# EAGLE board touch_pot_Panel_v12 (EAGLE 6.6.0), part 1 of 2
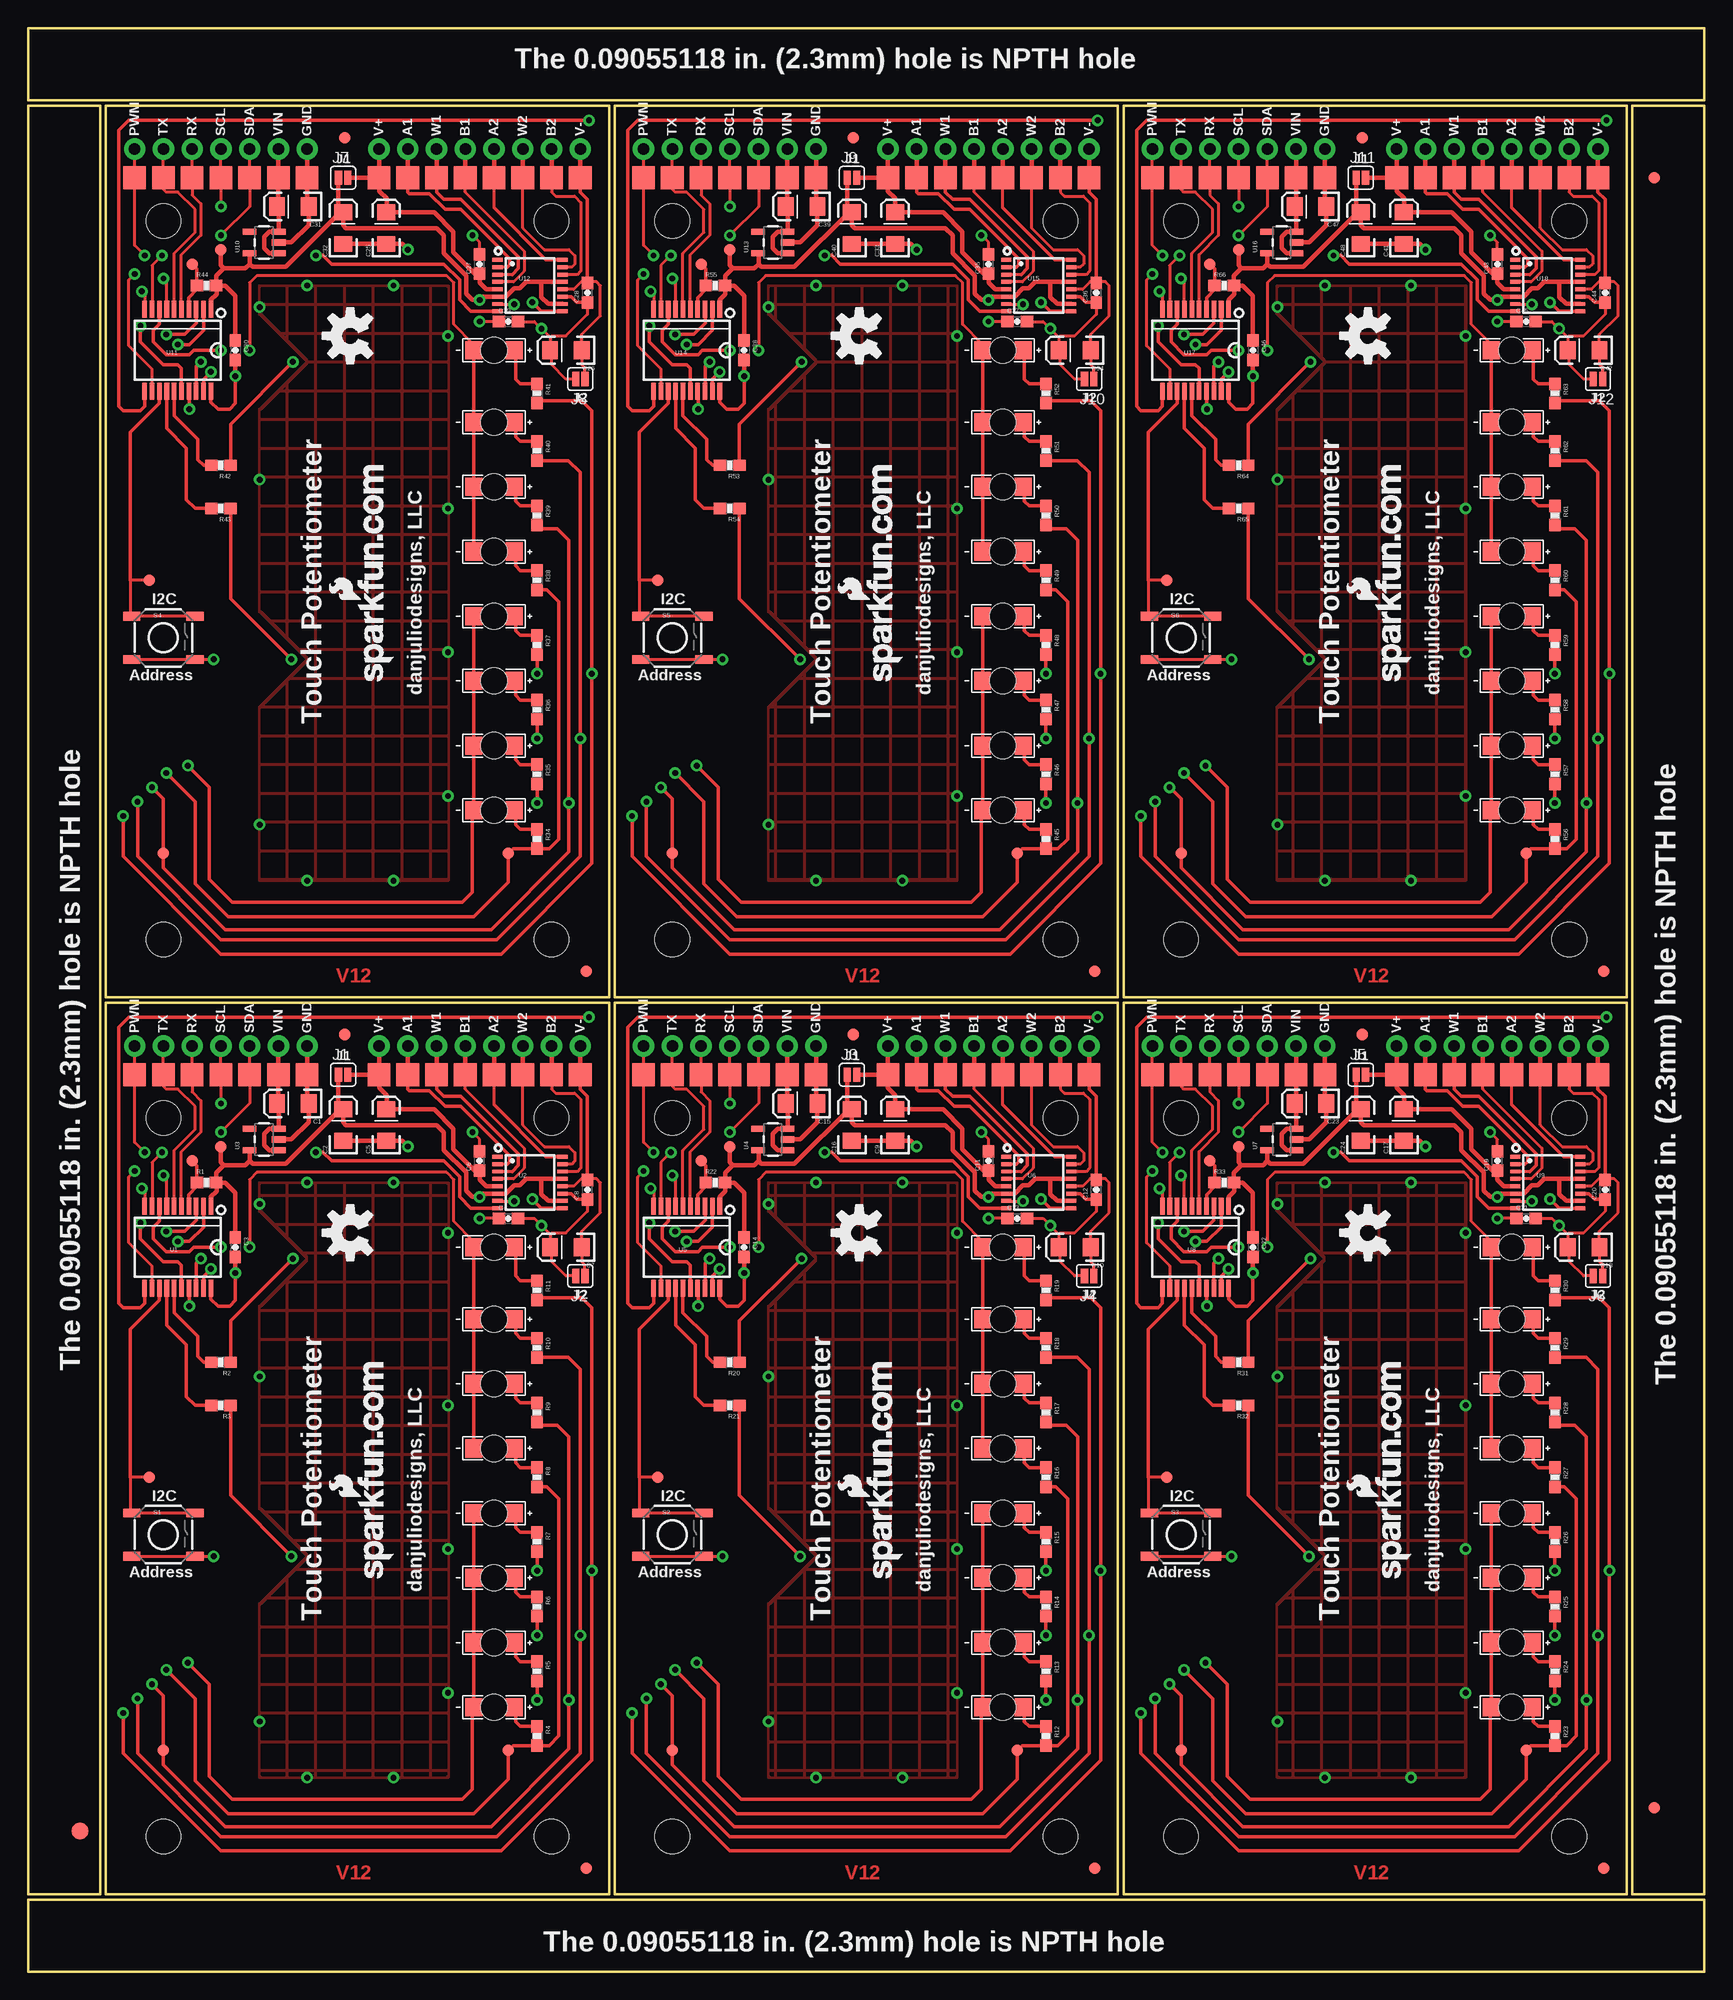
[diagram p0: board, top side]
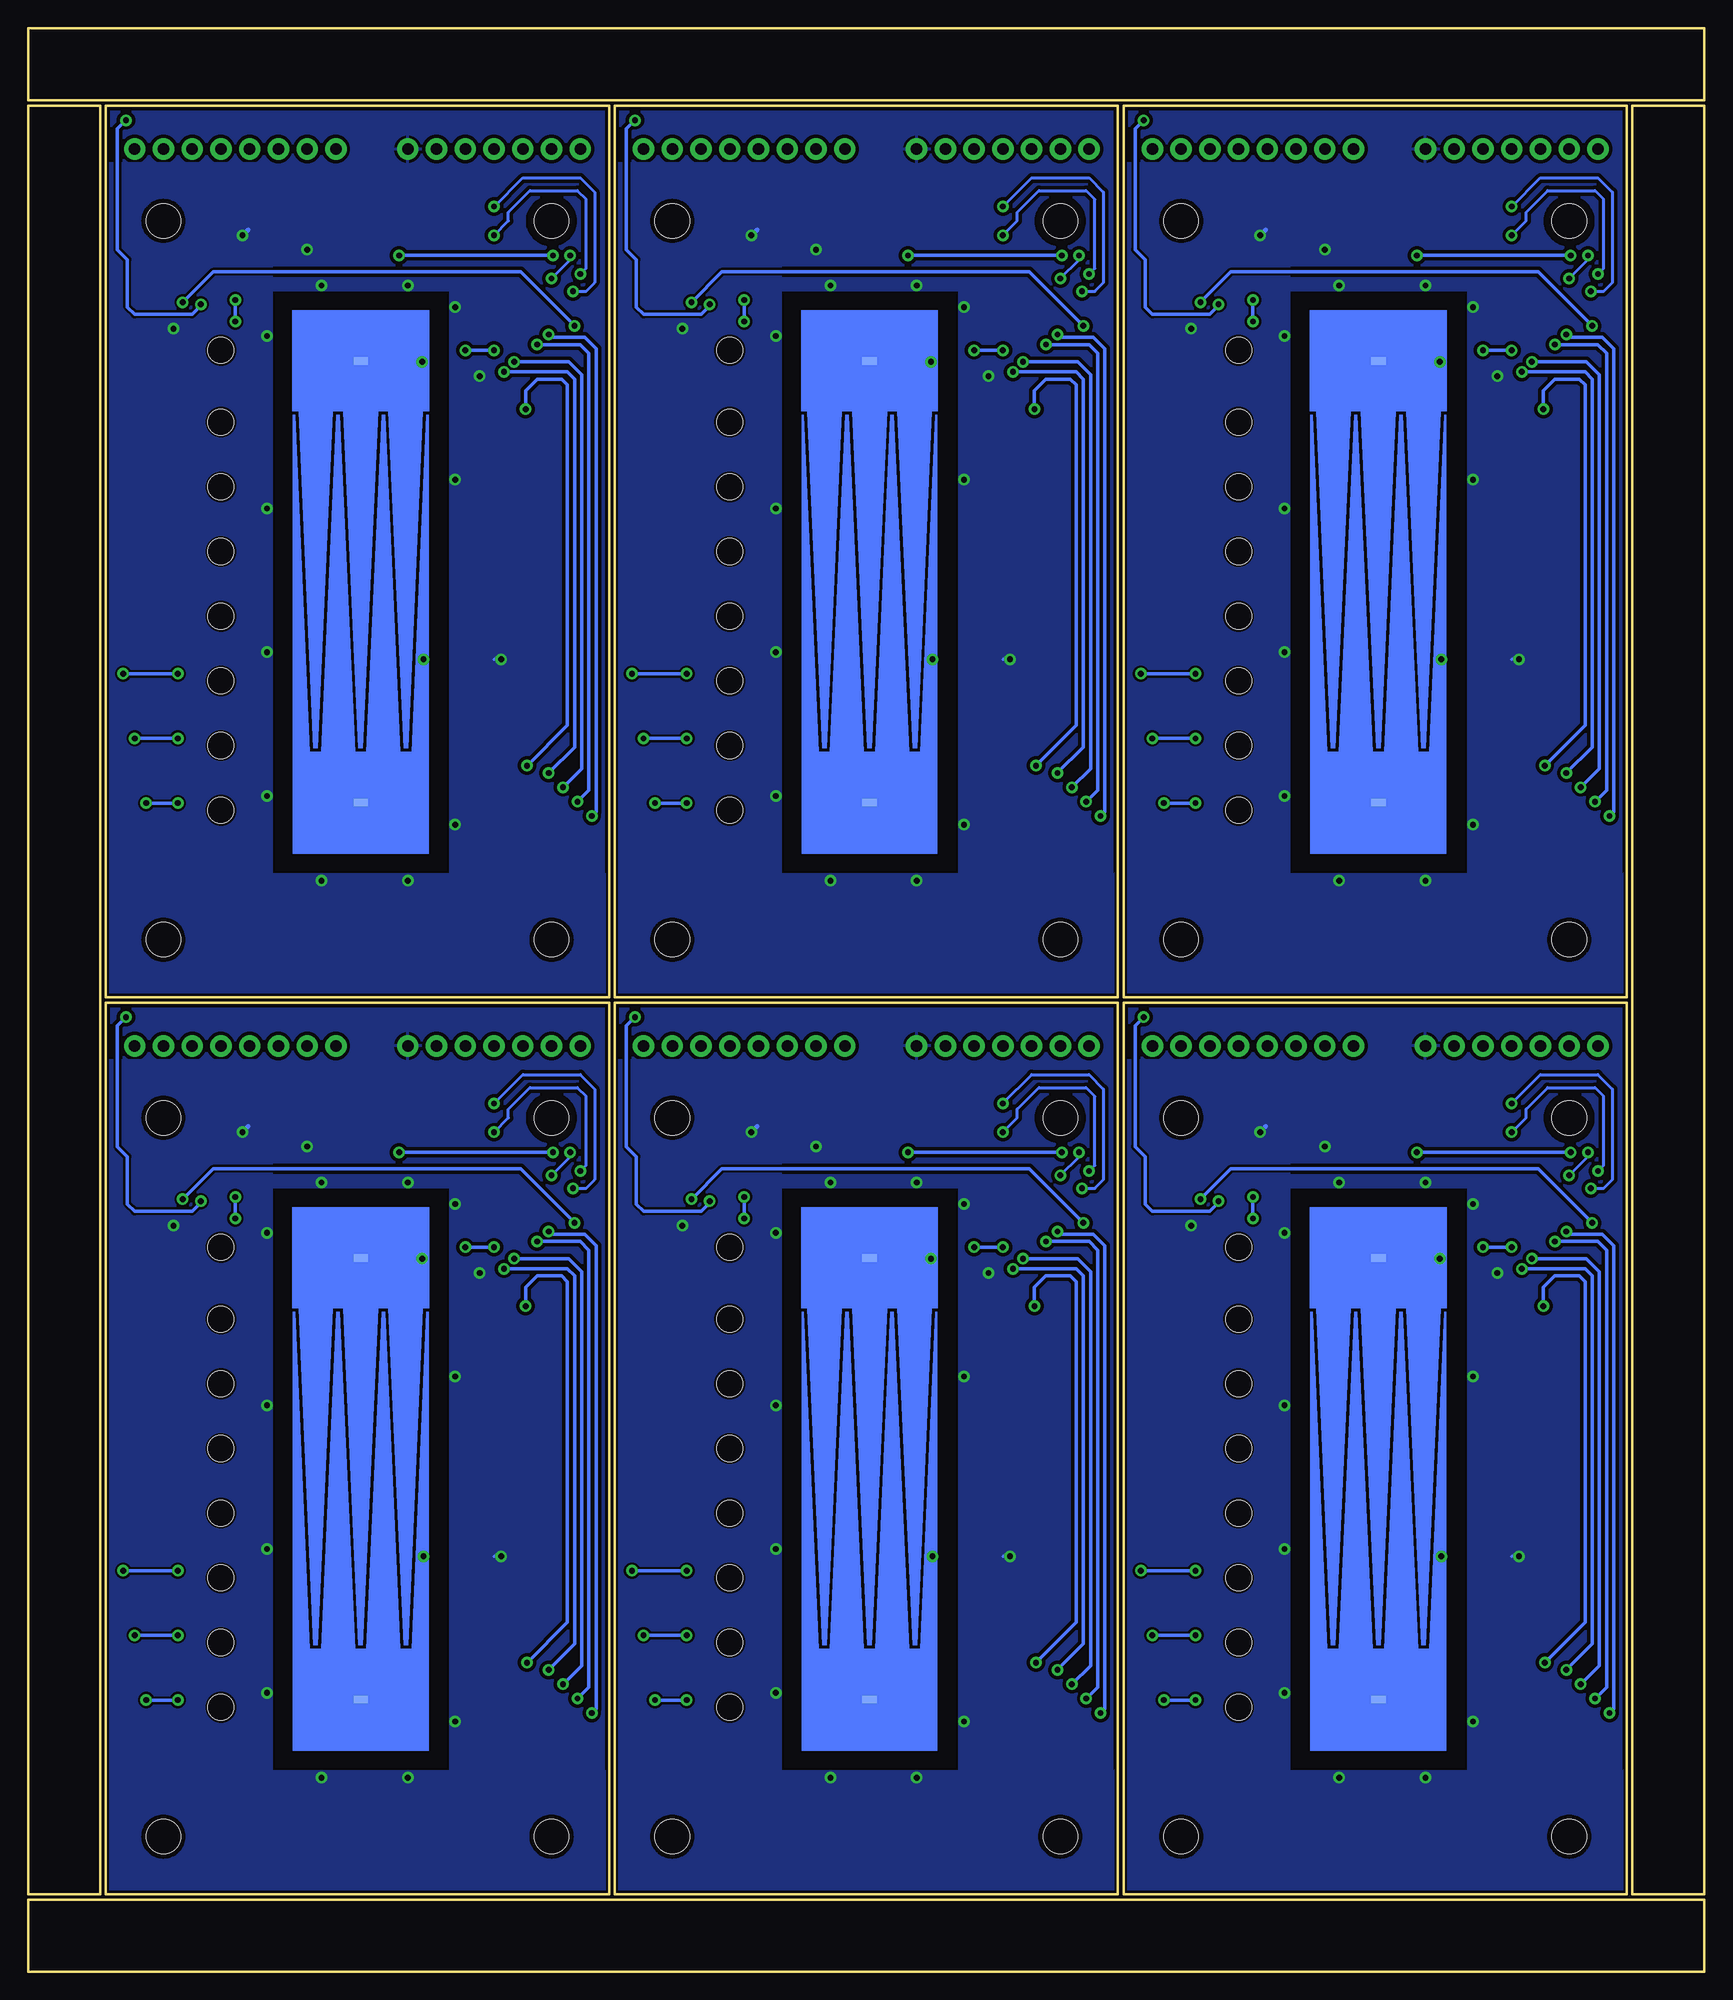
[diagram p1: board, bottom side, seen from below]

Size 148.08 x 171.7 mm. Coordinates in mm from the lower left corner, seen from the top.
Outline: 6.86,6.86 51.31,6.86 51.31,85.6 6.86,85.6 6.86,6.86
Outline: 51.82,6.86 96.27,6.86 96.27,85.6 51.82,85.6 51.82,6.86
Outline: 96.77,6.86 141.22,6.86 141.22,85.6 96.77,85.6 96.77,6.86
Outline: 6.86,86.11 51.31,86.11 51.31,164.85 6.86,164.85 6.86,86.11
Outline: 51.82,86.11 96.27,86.11 96.27,164.85 51.82,164.85 51.82,86.11
Outline: 96.77,86.11 141.22,86.11 141.22,164.85 96.77,164.85 96.77,86.11
Outline: 6.35,6.86 6.35,164.85 0,164.85 0,6.86 6.35,6.86
Outline: 0,0 148.08,0 148.08,6.35 0,6.35 0,0
Outline: 141.73,6.86 148.08,6.86 148.08,164.85 141.73,164.85 141.73,6.86
Outline: 148.08,171.7 0,171.7 0,165.35 148.08,165.35 148.08,171.7
Copper layers (1*16): Top 0.035mm / dielectric 1.5mm / Bottom 0.035mm
Design rules "SparkFun-2-layer": minimum track width 7mil, minimum drill 15mil, track to track 8mil, track to pad 8mil, pad to pad 8mil, via to via 8mil, smd to smd 8mil, copper to edge 8mil, drill to drill 8mil, minimum pad ring 12mil, minimum via ring 10mil, stop-mask expansion 4mil, vias tented up to drill 20mil, thermal gap 10mil

## Footprints (pad centres in the part's own frame; a part is rotated, then mirrored left to right if it is on the bottom)
EIA3216 = smd 1.4 x 1.6: A 1.4,0; C -1.4,0
0603-CAP = smd 1.1 x 1: 1 -0.85,0; 2 0.85,0
2MM_SMD_PAD = smd 2 x 2: P$1 0,0
LED-1206-BOTTOM = smd 1.5 x 1.6: A -1.8,0; C 1.8,0 | hole 2.3: 0,0
FIDUCIAL-1.5X3 = smd 1.5 x 1.5: 1 0,0
FIDUCIAL-1X2 = smd 1 x 1: 1 0,0
SJ_2S = smd 0.635 x 1.27: 1 -0.412,0; 2 0.412,0
1X01NS = drill 1.016 pad 1.88: 1 0,0
0603-RES = smd 1.1 x 1: 1 -0.85,0; 2 0.85,0
TACTILE-SWITCH-SMD = smd 1.524 x 0.762: 1 -2.794,1.905; 2 2.794,1.905; 3 -2.794,-1.905; 4 2.794,-1.905
STAND-OFF-TIGHT = hole 3.048: 0,0
PAD.03X.04 = smd 1.016 x 1.016: P$1 0,0
2CH_48MM_LINEAR_TOUCH = smd 1.27 x 0.635: P$1 6,4.5; P$2 6,43.5
SSOP20 = smd 0.4 x 1.5: 1 -2.925,-3.625; 2 -2.275,-3.625; 3 -1.625,-3.625; 4 -0.975,-3.625; 5 -0.325,-3.625; 6 0.325,-3.625; 7 0.975,-3.625; 8 1.625,-3.625; 9 2.275,-3.625; 10 2.925,-3.625; 11 2.925,3.625; 12 2.275,3.625; 13 1.625,3.625; 14 0.975,3.625; 15 0.325,3.625; 16 -0.325,3.625; 17 -0.975,3.625; 18 -1.625,3.625; 19 -2.275,3.625; 20 -2.925,3.625
SSOP16 = smd 0.9 x 0.35: 1 -2.875,2.275; 2 -2.875,1.625; 3 -2.875,0.975; 4 -2.875,0.325; 5 -2.875,-0.325; 6 -2.875,-0.975; 7 -2.875,-1.625; 8 -2.875,-2.275; 9 2.875,-2.275; 10 2.875,-1.625; 11 2.875,-0.975; 12 2.875,-0.325; 13 2.875,0.325; 14 2.875,0.975; 15 2.875,1.625; 16 2.875,2.275
SOT23-5 = smd 0.55 x 1.2: 1 -0.95,-1.3; 2 0,-1.3; 3 0.95,-1.3; 4 0.95,1.3; 5 -0.95,1.3

## Placement (x,y rotation side)
C1  10uF  [EIA3216]  23.37,76.71 180 top
C2  10uF  [EIA3216]  27.81,74.8 90 top
C3  0.1uF  [0603-CAP]  18.29,64.01 270 top
C4  0.1uF  [0603-CAP]  42.42,66.55 0 top
C5  10uF  [EIA3216]  31.62,74.8 90 top
C6  0.1uF  [0603-CAP]  39.88,71.63 90 top
C7  10uF  [EIA3216]  47.5,64.01 180 top
C8  0.1uF  [0603-CAP]  49.4,69.09 90 top
C9  10uF  [EIA3216]  76.58,74.8 90 top
C10  10uF  [EIA3216]  92.46,64.01 180 top
C11  0.1uF  [0603-CAP]  84.84,71.63 90 top
C12  0.1uF  [0603-CAP]  94.36,69.09 90 top
C13  0.1uF  [0603-CAP]  87.38,66.55 0 top
C14  0.1uF  [0603-CAP]  63.25,64.01 270 top
C15  10uF  [EIA3216]  68.33,76.71 180 top
C16  10uF  [EIA3216]  72.77,74.8 90 top
C17  10uF  [EIA3216]  121.54,74.8 90 top
C18  10uF  [EIA3216]  137.41,64.01 180 top
C19  0.1uF  [0603-CAP]  129.79,71.63 90 top
C20  0.1uF  [0603-CAP]  139.32,69.09 90 top
C21  0.1uF  [0603-CAP]  132.33,66.55 0 top
C22  0.1uF  [0603-CAP]  108.2,64.01 270 top
C23  10uF  [EIA3216]  113.28,76.71 180 top
C24  10uF  [EIA3216]  117.73,74.8 90 top
C25  10uF  [EIA3216]  31.62,154.05 90 top
C26  10uF  [EIA3216]  47.5,143.26 180 top
C27  0.1uF  [0603-CAP]  39.88,150.88 90 top
C28  0.1uF  [0603-CAP]  49.4,148.34 90 top
C29  0.1uF  [0603-CAP]  42.42,145.8 0 top
C30  0.1uF  [0603-CAP]  18.29,143.26 270 top
C31  10uF  [EIA3216]  23.37,155.96 180 top
C32  10uF  [EIA3216]  27.81,154.05 90 top
C33  10uF  [EIA3216]  76.58,154.05 90 top
C34  10uF  [EIA3216]  92.46,143.26 180 top
C35  0.1uF  [0603-CAP]  84.84,150.88 90 top
C36  0.1uF  [0603-CAP]  94.36,148.34 90 top
C37  0.1uF  [0603-CAP]  87.38,145.8 0 top
C38  0.1uF  [0603-CAP]  63.25,143.26 270 top
C39  10uF  [EIA3216]  68.33,155.96 180 top
C40  10uF  [EIA3216]  72.77,154.05 90 top
C41  10uF  [EIA3216]  121.54,154.05 90 top
C42  10uF  [EIA3216]  137.41,143.26 180 top
C43  0.1uF  [0603-CAP]  129.79,150.88 90 top
C44  0.1uF  [0603-CAP]  139.32,148.34 90 top
C45  0.1uF  [0603-CAP]  132.33,145.8 0 top
C46  0.1uF  [0603-CAP]  108.2,143.26 270 top
C47  10uF  [EIA3216]  113.28,155.96 180 top
C48  10uF  [EIA3216]  117.73,154.05 90 top
CON1  [2MM_SMD_PAD]  19.56,79.25 0 top
CON2  [2MM_SMD_PAD]  17.02,79.25 0 top
CON3  [2MM_SMD_PAD]  9.4,79.25 0 top
CON4  [2MM_SMD_PAD]  14.48,79.25 0 top
CON5  [2MM_SMD_PAD]  11.94,79.25 0 top
CON6  [2MM_SMD_PAD]  22.1,79.25 0 top
CON7  [2MM_SMD_PAD]  24.64,79.25 0 top
CON8  [2MM_SMD_PAD]  48.77,79.25 0 top
CON9  [2MM_SMD_PAD]  46.23,79.25 0 top
CON10  [2MM_SMD_PAD]  43.69,79.25 0 top
CON11  [2MM_SMD_PAD]  41.15,79.25 0 top
CON12  [2MM_SMD_PAD]  38.61,79.25 0 top
CON13  [2MM_SMD_PAD]  36.07,79.25 0 top
CON14  [2MM_SMD_PAD]  33.53,79.25 0 top
CON15  [2MM_SMD_PAD]  30.99,79.25 0 top
CON16  [2MM_SMD_PAD]  64.52,79.25 0 top
CON17  [2MM_SMD_PAD]  61.98,79.25 0 top
CON18  [2MM_SMD_PAD]  54.36,79.25 0 top
CON19  [2MM_SMD_PAD]  59.44,79.25 0 top
CON20  [2MM_SMD_PAD]  56.9,79.25 0 top
CON21  [2MM_SMD_PAD]  67.06,79.25 0 top
CON22  [2MM_SMD_PAD]  69.6,79.25 0 top
CON23  [2MM_SMD_PAD]  93.73,79.25 0 top
CON24  [2MM_SMD_PAD]  91.19,79.25 0 top
CON25  [2MM_SMD_PAD]  88.65,79.25 0 top
CON26  [2MM_SMD_PAD]  86.11,79.25 0 top
CON27  [2MM_SMD_PAD]  83.57,79.25 0 top
CON28  [2MM_SMD_PAD]  81.03,79.25 0 top
CON29  [2MM_SMD_PAD]  78.49,79.25 0 top
CON30  [2MM_SMD_PAD]  75.95,79.25 0 top
CON31  [2MM_SMD_PAD]  109.47,79.25 0 top
CON32  [2MM_SMD_PAD]  106.93,79.25 0 top
CON33  [2MM_SMD_PAD]  99.31,79.25 0 top
CON34  [2MM_SMD_PAD]  104.39,79.25 0 top
CON35  [2MM_SMD_PAD]  101.85,79.25 0 top
CON36  [2MM_SMD_PAD]  112.01,79.25 0 top
CON37  [2MM_SMD_PAD]  114.55,79.25 0 top
CON38  [2MM_SMD_PAD]  138.68,79.25 0 top
CON39  [2MM_SMD_PAD]  136.14,79.25 0 top
CON40  [2MM_SMD_PAD]  133.6,79.25 0 top
CON41  [2MM_SMD_PAD]  131.06,79.25 0 top
CON42  [2MM_SMD_PAD]  128.52,79.25 0 top
CON43  [2MM_SMD_PAD]  125.98,79.25 0 top
CON44  [2MM_SMD_PAD]  123.44,79.25 0 top
CON45  [2MM_SMD_PAD]  120.9,79.25 0 top
CON46  [2MM_SMD_PAD]  19.56,158.5 0 top
CON47  [2MM_SMD_PAD]  17.02,158.5 0 top
CON48  [2MM_SMD_PAD]  9.4,158.5 0 top
CON49  [2MM_SMD_PAD]  14.48,158.5 0 top
CON50  [2MM_SMD_PAD]  11.94,158.5 0 top
CON51  [2MM_SMD_PAD]  22.1,158.5 0 top
CON52  [2MM_SMD_PAD]  24.64,158.5 0 top
CON53  [2MM_SMD_PAD]  48.77,158.5 0 top
CON54  [2MM_SMD_PAD]  46.23,158.5 0 top
CON55  [2MM_SMD_PAD]  43.69,158.5 0 top
CON56  [2MM_SMD_PAD]  41.15,158.5 0 top
CON57  [2MM_SMD_PAD]  38.61,158.5 0 top
CON58  [2MM_SMD_PAD]  36.07,158.5 0 top
CON59  [2MM_SMD_PAD]  33.53,158.5 0 top
CON60  [2MM_SMD_PAD]  30.99,158.5 0 top
CON61  [2MM_SMD_PAD]  64.52,158.5 0 top
CON62  [2MM_SMD_PAD]  61.98,158.5 0 top
CON63  [2MM_SMD_PAD]  54.36,158.5 0 top
CON64  [2MM_SMD_PAD]  59.44,158.5 0 top
CON65  [2MM_SMD_PAD]  56.9,158.5 0 top
CON66  [2MM_SMD_PAD]  67.06,158.5 0 top
CON67  [2MM_SMD_PAD]  69.6,158.5 0 top
CON68  [2MM_SMD_PAD]  93.73,158.5 0 top
CON69  [2MM_SMD_PAD]  91.19,158.5 0 top
CON70  [2MM_SMD_PAD]  88.65,158.5 0 top
CON71  [2MM_SMD_PAD]  86.11,158.5 0 top
CON72  [2MM_SMD_PAD]  83.57,158.5 0 top
CON73  [2MM_SMD_PAD]  81.03,158.5 0 top
CON74  [2MM_SMD_PAD]  78.49,158.5 0 top
CON75  [2MM_SMD_PAD]  75.95,158.5 0 top
CON76  [2MM_SMD_PAD]  109.47,158.5 0 top
CON77  [2MM_SMD_PAD]  106.93,158.5 0 top
CON78  [2MM_SMD_PAD]  99.31,158.5 0 top
CON79  [2MM_SMD_PAD]  104.39,158.5 0 top
CON80  [2MM_SMD_PAD]  101.85,158.5 0 top
CON81  [2MM_SMD_PAD]  112.01,158.5 0 top
CON82  [2MM_SMD_PAD]  114.55,158.5 0 top
CON83  [2MM_SMD_PAD]  138.68,158.5 0 top
CON84  [2MM_SMD_PAD]  136.14,158.5 0 top
CON85  [2MM_SMD_PAD]  133.6,158.5 0 top
CON86  [2MM_SMD_PAD]  131.06,158.5 0 top
CON87  [2MM_SMD_PAD]  128.52,158.5 0 top
CON88  [2MM_SMD_PAD]  125.98,158.5 0 top
CON89  [2MM_SMD_PAD]  123.44,158.5 0 top
CON90  [2MM_SMD_PAD]  120.9,158.5 0 top
D1  Green  [LED-1206-BOTTOM]  41.15,23.37 180 top
D2  Green  [LED-1206-BOTTOM]  41.15,29.08 180 top
D3  Green  [LED-1206-BOTTOM]  41.15,34.8 180 top
D4  Green  [LED-1206-BOTTOM]  41.15,40.51 180 top
D5  Green  [LED-1206-BOTTOM]  41.15,46.23 180 top
D6  Green  [LED-1206-BOTTOM]  41.15,51.94 180 top
D7  Green  [LED-1206-BOTTOM]  41.15,57.66 180 top
D8  Green  [LED-1206-BOTTOM]  41.15,64.01 180 top
D9  Green  [LED-1206-BOTTOM]  86.11,23.37 180 top
D10  Green  [LED-1206-BOTTOM]  86.11,29.08 180 top
D11  Green  [LED-1206-BOTTOM]  86.11,34.8 180 top
D12  Green  [LED-1206-BOTTOM]  86.11,40.51 180 top
D13  Green  [LED-1206-BOTTOM]  86.11,46.23 180 top
D14  Green  [LED-1206-BOTTOM]  86.11,51.94 180 top
D15  Green  [LED-1206-BOTTOM]  86.11,57.66 180 top
D16  Green  [LED-1206-BOTTOM]  86.11,64.01 180 top
D17  Green  [LED-1206-BOTTOM]  131.06,23.37 180 top
D18  Green  [LED-1206-BOTTOM]  131.06,29.08 180 top
D19  Green  [LED-1206-BOTTOM]  131.06,34.8 180 top
D20  Green  [LED-1206-BOTTOM]  131.06,40.51 180 top
D21  Green  [LED-1206-BOTTOM]  131.06,46.23 180 top
D22  Green  [LED-1206-BOTTOM]  131.06,51.94 180 top
D23  Green  [LED-1206-BOTTOM]  131.06,57.66 180 top
D24  Green  [LED-1206-BOTTOM]  131.06,64.01 180 top
D25  Green  [LED-1206-BOTTOM]  41.15,102.62 180 top
D26  Green  [LED-1206-BOTTOM]  41.15,108.33 180 top
D27  Green  [LED-1206-BOTTOM]  41.15,114.05 180 top
D28  Green  [LED-1206-BOTTOM]  41.15,119.76 180 top
D29  Green  [LED-1206-BOTTOM]  41.15,125.48 180 top
D30  Green  [LED-1206-BOTTOM]  41.15,131.19 180 top
D31  Green  [LED-1206-BOTTOM]  41.15,136.91 180 top
D32  Green  [LED-1206-BOTTOM]  41.15,143.26 180 top
D33  Green  [LED-1206-BOTTOM]  86.11,102.62 180 top
D34  Green  [LED-1206-BOTTOM]  86.11,108.33 180 top
D35  Green  [LED-1206-BOTTOM]  86.11,114.05 180 top
D36  Green  [LED-1206-BOTTOM]  86.11,119.76 180 top
D37  Green  [LED-1206-BOTTOM]  86.11,125.48 180 top
D38  Green  [LED-1206-BOTTOM]  86.11,131.19 180 top
D39  Green  [LED-1206-BOTTOM]  86.11,136.91 180 top
D40  Green  [LED-1206-BOTTOM]  86.11,143.26 180 top
D41  Green  [LED-1206-BOTTOM]  131.06,102.62 180 top
D42  Green  [LED-1206-BOTTOM]  131.06,108.33 180 top
D43  Green  [LED-1206-BOTTOM]  131.06,114.05 180 top
D44  Green  [LED-1206-BOTTOM]  131.06,119.76 180 top
D45  Green  [LED-1206-BOTTOM]  131.06,125.48 180 top
D46  Green  [LED-1206-BOTTOM]  131.06,131.19 180 top
D47  Green  [LED-1206-BOTTOM]  131.06,136.91 180 top
D48  Green  [LED-1206-BOTTOM]  131.06,143.26 180 top
E$1  [FIDUCIAL-1.5X3]  4.57,12.45 0 top
E$4  [FIDUCIAL-1X2]  143.64,14.48 0 top
E$5  [FIDUCIAL-1X2]  143.64,158.5 180 top
FID1  FIDUCIAL1X2  [FIDUCIAL-1X2]  27.94,82.8 0 top
FID2  FIDUCIAL1X2  [FIDUCIAL-1X2]  49.28,9.14 0 top
FID3  FIDUCIAL1X2  [FIDUCIAL-1X2]  72.9,82.8 0 top
FID4  FIDUCIAL1X2  [FIDUCIAL-1X2]  94.23,9.14 0 top
FID5  FIDUCIAL1X2  [FIDUCIAL-1X2]  117.86,82.8 0 top
FID6  FIDUCIAL1X2  [FIDUCIAL-1X2]  139.19,9.14 0 top
FID7  FIDUCIAL1X2  [FIDUCIAL-1X2]  27.94,162.05 0 top
FID8  FIDUCIAL1X2  [FIDUCIAL-1X2]  49.28,88.39 0 top
FID9  FIDUCIAL1X2  [FIDUCIAL-1X2]  72.9,162.05 0 top
FID10  FIDUCIAL1X2  [FIDUCIAL-1X2]  94.23,88.39 0 top
FID11  FIDUCIAL1X2  [FIDUCIAL-1X2]  117.86,162.05 0 top
FID12  FIDUCIAL1X2  [FIDUCIAL-1X2]  139.19,88.39 0 top
J1  [SJ_2S]  27.81,79.25 0 top
J2  [SJ_2S]  48.77,61.47 0 top
J3  [SJ_2S]  72.77,79.25 0 top
J4  [SJ_2S]  93.73,61.47 0 top
J5  [SJ_2S]  117.73,79.25 0 top
J6  [SJ_2S]  138.68,61.47 0 top
J7  [SJ_2S]  27.81,158.5 0 top
J8  [SJ_2S]  48.77,140.72 0 top
J9  [SJ_2S]  72.77,158.5 0 top
J10  [SJ_2S]  93.73,140.72 0 top
J11  [SJ_2S]  117.73,158.5 0 top
J12  [SJ_2S]  138.68,140.72 0 top
JP1  [1X01NS]  19.56,81.79 0 top
JP2  [1X01NS]  17.02,81.79 0 top
JP3  [1X01NS]  9.4,81.79 0 top
JP4  [1X01NS]  14.48,81.79 0 top
JP5  [1X01NS]  11.94,81.79 0 top
JP6  [1X01NS]  22.1,81.79 0 top
JP7  [1X01NS]  24.64,81.79 0 top
JP8  [1X01NS]  48.77,81.79 0 top
JP9  [1X01NS]  46.23,81.79 0 top
JP10  [1X01NS]  43.69,81.79 0 top
JP11  [1X01NS]  41.15,81.79 0 top
JP12  [1X01NS]  38.61,81.79 0 top
JP13  [1X01NS]  36.07,81.79 0 top
JP14  [1X01NS]  33.53,81.79 0 top
JP15  [1X01NS]  30.99,81.79 0 top
JP16  [1X01NS]  64.52,81.79 0 top
JP17  [1X01NS]  61.98,81.79 0 top
JP18  [1X01NS]  54.36,81.79 0 top
JP19  [1X01NS]  59.44,81.79 0 top
JP20  [1X01NS]  56.9,81.79 0 top
JP21  [1X01NS]  67.06,81.79 0 top
JP22  [1X01NS]  69.6,81.79 0 top
JP23  [1X01NS]  93.73,81.79 0 top
JP24  [1X01NS]  91.19,81.79 0 top
JP25  [1X01NS]  88.65,81.79 0 top
JP26  [1X01NS]  86.11,81.79 0 top
JP27  [1X01NS]  83.57,81.79 0 top
JP28  [1X01NS]  81.03,81.79 0 top
JP29  [1X01NS]  78.49,81.79 0 top
JP30  [1X01NS]  75.95,81.79 0 top
JP31  [1X01NS]  109.47,81.79 0 top
JP32  [1X01NS]  106.93,81.79 0 top
JP33  [1X01NS]  99.31,81.79 0 top
JP34  [1X01NS]  104.39,81.79 0 top
JP35  [1X01NS]  101.85,81.79 0 top
JP36  [1X01NS]  112.01,81.79 0 top
JP37  [1X01NS]  114.55,81.79 0 top
JP38  [1X01NS]  138.68,81.79 0 top
JP39  [1X01NS]  136.14,81.79 0 top
JP40  [1X01NS]  133.6,81.79 0 top
JP41  [1X01NS]  131.06,81.79 0 top
JP42  [1X01NS]  128.52,81.79 0 top
JP43  [1X01NS]  125.98,81.79 0 top
JP44  [1X01NS]  123.44,81.79 0 top
JP45  [1X01NS]  120.9,81.79 0 top
JP46  [1X01NS]  19.56,161.04 0 top
JP47  [1X01NS]  17.02,161.04 0 top
JP48  [1X01NS]  9.4,161.04 0 top
JP49  [1X01NS]  14.48,161.04 0 top
JP50  [1X01NS]  11.94,161.04 0 top
JP51  [1X01NS]  22.1,161.04 0 top
JP52  [1X01NS]  24.64,161.04 0 top
JP53  [1X01NS]  48.77,161.04 0 top
JP54  [1X01NS]  46.23,161.04 0 top
JP55  [1X01NS]  43.69,161.04 0 top
JP56  [1X01NS]  41.15,161.04 0 top
JP57  [1X01NS]  38.61,161.04 0 top
JP58  [1X01NS]  36.07,161.04 0 top
JP59  [1X01NS]  33.53,161.04 0 top
JP60  [1X01NS]  30.99,161.04 0 top
JP61  [1X01NS]  64.52,161.04 0 top
JP62  [1X01NS]  61.98,161.04 0 top
JP63  [1X01NS]  54.36,161.04 0 top
JP64  [1X01NS]  59.44,161.04 0 top
JP65  [1X01NS]  56.9,161.04 0 top
JP66  [1X01NS]  67.06,161.04 0 top
JP67  [1X01NS]  69.6,161.04 0 top
JP68  [1X01NS]  93.73,161.04 0 top
JP69  [1X01NS]  91.19,161.04 0 top
JP70  [1X01NS]  88.65,161.04 0 top
JP71  [1X01NS]  86.11,161.04 0 top
JP72  [1X01NS]  83.57,161.04 0 top
JP73  [1X01NS]  81.03,161.04 0 top
JP74  [1X01NS]  78.49,161.04 0 top
JP75  [1X01NS]  75.95,161.04 0 top
JP76  [1X01NS]  109.47,161.04 0 top
JP77  [1X01NS]  106.93,161.04 0 top
JP78  [1X01NS]  99.31,161.04 0 top
JP79  [1X01NS]  104.39,161.04 0 top
JP80  [1X01NS]  101.85,161.04 0 top
JP81  [1X01NS]  112.01,161.04 0 top
JP82  [1X01NS]  114.55,161.04 0 top
JP83  [1X01NS]  138.68,161.04 0 top
JP84  [1X01NS]  136.14,161.04 0 top
JP85  [1X01NS]  133.6,161.04 0 top
JP86  [1X01NS]  131.06,161.04 0 top
JP87  [1X01NS]  128.52,161.04 0 top
JP88  [1X01NS]  125.98,161.04 0 top
JP89  [1X01NS]  123.44,161.04 0 top
JP90  [1X01NS]  120.9,161.04 0 top
R1  10K  [0603-RES]  15.75,69.72 0 top
R2  100  [0603-RES]  17.02,53.85 180 top
R3  100  [0603-RES]  17.02,50.04 180 top
R4  100  [0603-RES]  44.96,20.83 270 top
R5  100  [0603-RES]  44.96,26.54 270 top
R6  100  [0603-RES]  44.96,32.26 270 top
R7  100  [0603-RES]  44.96,37.97 270 top
R8  100  [0603-RES]  44.96,43.69 270 top
R9  100  [0603-RES]  44.96,49.4 270 top
R10  100  [0603-RES]  44.96,55.12 270 top
R11  100  [0603-RES]  44.96,60.2 270 top
R12  100  [0603-RES]  89.92,20.83 270 top
R13  100  [0603-RES]  89.92,26.54 270 top
R14  100  [0603-RES]  89.92,32.26 270 top
R15  100  [0603-RES]  89.92,37.97 270 top
R16  100  [0603-RES]  89.92,43.69 270 top
R17  100  [0603-RES]  89.92,49.4 270 top
R18  100  [0603-RES]  89.92,55.12 270 top
R19  100  [0603-RES]  89.92,60.2 270 top
R20  100  [0603-RES]  61.98,53.85 180 top
R21  100  [0603-RES]  61.98,50.04 180 top
R22  10K  [0603-RES]  60.71,69.72 0 top
R23  100  [0603-RES]  134.87,20.83 270 top
R24  100  [0603-RES]  134.87,26.54 270 top
R25  100  [0603-RES]  134.87,32.26 270 top
R26  100  [0603-RES]  134.87,37.97 270 top
R27  100  [0603-RES]  134.87,43.69 270 top
R28  100  [0603-RES]  134.87,49.4 270 top
R29  100  [0603-RES]  134.87,55.12 270 top
R30  100  [0603-RES]  134.87,60.2 270 top
R31  100  [0603-RES]  106.93,53.85 180 top
R32  100  [0603-RES]  106.93,50.04 180 top
R33  10K  [0603-RES]  105.66,69.72 0 top
R34  100  [0603-RES]  44.96,100.08 270 top
R35  100  [0603-RES]  44.96,105.79 270 top
R36  100  [0603-RES]  44.96,111.51 270 top
R37  100  [0603-RES]  44.96,117.22 270 top
R38  100  [0603-RES]  44.96,122.94 270 top
R39  100  [0603-RES]  44.96,128.65 270 top
R40  100  [0603-RES]  44.96,134.37 270 top
R41  100  [0603-RES]  44.96,139.45 270 top
R42  100  [0603-RES]  17.02,133.1 180 top
R43  100  [0603-RES]  17.02,129.29 180 top
R44  10K  [0603-RES]  15.75,148.97 0 top
R45  100  [0603-RES]  89.92,100.08 270 top
R46  100  [0603-RES]  89.92,105.79 270 top
R47  100  [0603-RES]  89.92,111.51 270 top
R48  100  [0603-RES]  89.92,117.22 270 top
R49  100  [0603-RES]  89.92,122.94 270 top
R50  100  [0603-RES]  89.92,128.65 270 top
R51  100  [0603-RES]  89.92,134.37 270 top
R52  100  [0603-RES]  89.92,139.45 270 top
R53  100  [0603-RES]  61.98,133.1 180 top
R54  100  [0603-RES]  61.98,129.29 180 top
R55  10K  [0603-RES]  60.71,148.97 0 top
R56  100  [0603-RES]  134.87,100.08 270 top
R57  100  [0603-RES]  134.87,105.79 270 top
R58  100  [0603-RES]  134.87,111.51 270 top
R59  100  [0603-RES]  134.87,117.22 270 top
R60  100  [0603-RES]  134.87,122.94 270 top
R61  100  [0603-RES]  134.87,128.65 270 top
R62  100  [0603-RES]  134.87,134.37 270 top
R63  100  [0603-RES]  134.87,139.45 270 top
R64  100  [0603-RES]  106.93,133.1 180 top
R65  100  [0603-RES]  106.93,129.29 180 top
R66  10K  [0603-RES]  105.66,148.97 0 top
S1  [TACTILE-SWITCH-SMD]  11.94,38.61 0 top
S2  [TACTILE-SWITCH-SMD]  56.9,38.61 0 top
S3  [TACTILE-SWITCH-SMD]  101.85,38.61 0 top
S4  [TACTILE-SWITCH-SMD]  11.94,117.86 0 top
S5  [TACTILE-SWITCH-SMD]  56.9,117.86 0 top
S6  [TACTILE-SWITCH-SMD]  101.85,117.86 0 top
STANDOFF1  STAND-OFFTIGHT  [STAND-OFF-TIGHT]  46.23,75.44 0 top
STANDOFF2  STAND-OFFTIGHT  [STAND-OFF-TIGHT]  11.94,75.44 0 top
STANDOFF3  STAND-OFFTIGHT  [STAND-OFF-TIGHT]  11.94,11.94 0 top
STANDOFF4  STAND-OFFTIGHT  [STAND-OFF-TIGHT]  46.23,11.94 0 top
STANDOFF5  STAND-OFFTIGHT  [STAND-OFF-TIGHT]  56.9,75.44 0 top
STANDOFF6  STAND-OFFTIGHT  [STAND-OFF-TIGHT]  56.9,11.94 0 top
STANDOFF7  STAND-OFFTIGHT  [STAND-OFF-TIGHT]  91.19,11.94 0 top
STANDOFF8  STAND-OFFTIGHT  [STAND-OFF-TIGHT]  91.19,75.44 0 top
STANDOFF9  STAND-OFFTIGHT  [STAND-OFF-TIGHT]  101.85,75.44 0 top
STANDOFF10  STAND-OFFTIGHT  [STAND-OFF-TIGHT]  101.85,11.94 0 top
STANDOFF11  STAND-OFFTIGHT  [STAND-OFF-TIGHT]  136.14,11.94 0 top
STANDOFF12  STAND-OFFTIGHT  [STAND-OFF-TIGHT]  136.14,75.44 0 top
STANDOFF13  STAND-OFFTIGHT  [STAND-OFF-TIGHT]  11.94,154.69 0 top
STANDOFF14  STAND-OFFTIGHT  [STAND-OFF-TIGHT]  11.94,91.19 0 top
STANDOFF15  STAND-OFFTIGHT  [STAND-OFF-TIGHT]  46.23,91.19 0 top
STANDOFF16  STAND-OFFTIGHT  [STAND-OFF-TIGHT]  46.23,154.69 0 top
STANDOFF17  STAND-OFFTIGHT  [STAND-OFF-TIGHT]  56.9,154.69 0 top
STANDOFF18  STAND-OFFTIGHT  [STAND-OFF-TIGHT]  56.9,91.19 0 top
STANDOFF19  STAND-OFFTIGHT  [STAND-OFF-TIGHT]  91.19,91.19 0 top
STANDOFF20  STAND-OFFTIGHT  [STAND-OFF-TIGHT]  91.19,154.69 0 top
STANDOFF21  STAND-OFFTIGHT  [STAND-OFF-TIGHT]  101.85,154.69 0 top
STANDOFF22  STAND-OFFTIGHT  [STAND-OFF-TIGHT]  101.85,91.19 0 top
STANDOFF23  STAND-OFFTIGHT  [STAND-OFF-TIGHT]  136.14,91.19 0 top
STANDOFF24  STAND-OFFTIGHT  [STAND-OFF-TIGHT]  136.14,154.69 0 top
TP1  [PAD.03X.04]  14.48,71.63 0 top
TP2  [PAD.03X.04]  17.02,72.9 0 top
TP3  [PAD.03X.04]  10.67,43.69 0 top
TP4  [PAD.03X.04]  42.42,19.56 0 top
TP5  [PAD.03X.04]  11.94,19.56 0 top
TP6  [PAD.03X.04]  61.98,72.9 0 top
TP7  [PAD.03X.04]  55.63,43.69 0 top
TP8  [PAD.03X.04]  59.44,71.63 0 top
TP9  [PAD.03X.04]  87.38,19.56 0 top
TP10  [PAD.03X.04]  56.9,19.56 0 top
TP11  [PAD.03X.04]  106.93,72.9 0 top
TP12  [PAD.03X.04]  100.58,43.69 0 top
TP13  [PAD.03X.04]  104.39,71.63 0 top
TP14  [PAD.03X.04]  132.33,19.56 0 top
TP15  [PAD.03X.04]  101.85,19.56 0 top
TP16  [PAD.03X.04]  17.02,152.15 0 top
TP17  [PAD.03X.04]  10.67,122.94 0 top
TP18  [PAD.03X.04]  14.48,150.88 0 top
TP19  [PAD.03X.04]  42.42,98.81 0 top
TP20  [PAD.03X.04]  11.94,98.81 0 top
TP21  [PAD.03X.04]  61.98,152.15 0 top
TP22  [PAD.03X.04]  55.63,122.94 0 top
TP23  [PAD.03X.04]  59.44,150.88 0 top
TP24  [PAD.03X.04]  87.38,98.81 0 top
TP25  [PAD.03X.04]  56.9,98.81 0 top
TP26  [PAD.03X.04]  106.93,152.15 0 top
TP27  [PAD.03X.04]  100.58,122.94 0 top
TP28  [PAD.03X.04]  104.39,150.88 0 top
TP29  [PAD.03X.04]  132.33,98.81 0 top
TP30  [PAD.03X.04]  101.85,98.81 0 top
TS1  [2CH_48MM_LINEAR_TOUCH]  34.8,19.56 0 bottom
TS2  [2CH_48MM_LINEAR_TOUCH]  79.76,19.56 0 bottom
TS3  [2CH_48MM_LINEAR_TOUCH]  124.71,19.56 0 bottom
TS4  [2CH_48MM_LINEAR_TOUCH]  34.8,98.81 0 bottom
TS5  [2CH_48MM_LINEAR_TOUCH]  79.76,98.81 0 bottom
TS6  [2CH_48MM_LINEAR_TOUCH]  124.71,98.81 0 bottom
U1  PIC16F1829  [SSOP20]  13.21,64.01 180 top
U2  AD5262  [SSOP16]  44.32,69.72 0 top
U3  5V  [SOT23-5]  20.83,73.53 90 top
U4  5V  [SOT23-5]  65.79,73.53 90 top
U5  PIC16F1829  [SSOP20]  58.17,64.01 180 top
U6  AD5262  [SSOP16]  89.28,69.72 0 top
U7  5V  [SOT23-5]  110.74,73.53 90 top
U8  PIC16F1829  [SSOP20]  103.12,64.01 180 top
U9  AD5262  [SSOP16]  134.24,69.72 0 top
U10  5V  [SOT23-5]  20.83,152.78 90 top
U11  PIC16F1829  [SSOP20]  13.21,143.26 180 top
U12  AD5262  [SSOP16]  44.32,148.97 0 top
U13  5V  [SOT23-5]  65.79,152.78 90 top
U14  PIC16F1829  [SSOP20]  58.17,143.26 180 top
U15  AD5262  [SSOP16]  89.28,148.97 0 top
U16  5V  [SOT23-5]  110.74,152.78 90 top
U17  PIC16F1829  [SSOP20]  103.12,143.26 180 top
U18  AD5262  [SSOP16]  134.24,148.97 0 top
U$1  OSHW-LOGOM  [OSHW-LOGO-M]  73.41,65.28 90 top
U$2  SFE_LOGO_NAME_WEB  [SFE-NEW-WEBLOGO]  77.22,34.8 90 top
U$3  OSHW-LOGOM  [OSHW-LOGO-M]  118.36,65.28 90 top
U$4  OSHW-LOGOM  [OSHW-LOGO-M]  28.45,65.28 90 top
U$5  SFE_LOGO_NAME_WEB  [SFE-NEW-WEBLOGO]  32.26,34.8 90 top
U$6  SFE_LOGO_NAME_WEB  [SFE-NEW-WEBLOGO]  122.17,34.8 90 top
U$7  OSHW-LOGOM  [OSHW-LOGO-M]  28.45,144.53 90 top
U$8  SFE_LOGO_NAME_WEB  [SFE-NEW-WEBLOGO]  32.26,114.05 90 top
U$9  OSHW-LOGOM  [OSHW-LOGO-M]  73.41,144.53 90 top
U$10  SFE_LOGO_NAME_WEB  [SFE-NEW-WEBLOGO]  77.22,114.05 90 top
U$11  OSHW-LOGOM  [OSHW-LOGO-M]  118.36,144.53 90 top
U$12  SFE_LOGO_NAME_WEB  [SFE-NEW-WEBLOGO]  122.17,114.05 90 top

## Library data of the parts
C1 C2 C5 C7 C9 C10 C15-C18 C23-C26 C31-C34 C39-C42 C47 C48 = SparkFun-Capacitors; PROD_ID: CAP-00811
C3 C4 C6 C8 C11-C14 C19-C22 C27-C30 C35-C38 C43-C46 = SparkFun-Capacitors; PROD_ID: CAP-00810
CON1-CON90 J1-J12 TS1-TS6 = djd_eagle_library
D1-D48 = SparkFun-LED; PROD_ID: DIO-11076
E$1 = SparkFun-Retired
E$4 E$5 FID1-FID12 U$2 U$5 U$6 U$8 U$10 U$12 = SparkFun-Aesthetics
JP1-JP90 U$1 U$3 U$4 U$7 U$9 U$11 = SparkFun
R1 R22 R33 R44 R55 R66 = SparkFun-Resistors; PROD_ID: RES-00824
R2-R21 R23-R32 R34-R43 R45-R54 R56-R65 = SparkFun-Resistors; PROD_ID: RES-07863
S1-S6 = SparkFun-Electromechanical; PROD_ID: SWCH-08247
STANDOFF1-STANDOFF24 = SparkFun-Electromechanical
TP1-TP30 = SparkFun-Passives
U1 U5 U8 U11 U14 U17 = SparkFun-DigitalIC
U2 U6 U9 U12 U15 U18 = SparkFun-AnalogIC
U3 U4 U7 U10 U13 U16 = SparkFun-PowerIC; PROD_ID: VREG-00823

## Nets
+5V: C2.A C3.1 C4.1 J1.1 R1.2 TP2.P$1 U1.1 U2.6 U2.10 U2.13 U3.5
+5V1: C13.1 C14.1 C16.A J3.1 R22.2 TP6.P$1 U4.5 U5.1 U6.6 U6.10 U6.13
+5V2: C21.1 C22.1 C24.A J5.1 R33.2 TP11.P$1 U7.5 U8.1 U9.6 U9.10 U9.13
+5V3: C29.1 C30.1 C32.A J7.1 R44.2 TP16.P$1 U10.5 U11.1 U12.6 U12.10 U12.13
+5V4: C37.1 C38.1 C40.A J9.1 R55.2 TP21.P$1 U13.5 U14.1 U15.6 U15.10 U15.13
+5V5: C45.1 C46.1 C48.A J11.1 R66.2 TP26.P$1 U16.5 U17.1 U18.6 U18.10 U18.13
A1: CON14.P$1 JP14.1 U2.2
A2: CON11.P$1 JP11.1 U2.16
A3: CON29.P$1 JP29.1 U6.2
A4: CON26.P$1 JP26.1 U6.16
A5: CON44.P$1 JP44.1 U9.2
A6: CON41.P$1 JP41.1 U9.16
A7: CON59.P$1 JP59.1 U12.2
A8: CON56.P$1 JP56.1 U12.16
A9: CON74.P$1 JP74.1 U15.2
A10: CON71.P$1 JP71.1 U15.16
A11: CON89.P$1 JP89.1 U18.2
A12: CON86.P$1 JP86.1 U18.16
AUX: S1.1 TP3.P$1 U1.13
AUX1: S2.1 TP7.P$1 U5.13
AUX2: S3.1 TP12.P$1 U8.13
AUX3: S4.1 TP17.P$1 U11.13
AUX4: S5.1 TP22.P$1 U14.13
AUX5: S6.1 TP27.P$1 U17.13
B1: CON12.P$1 JP12.1 U2.4
B2: CON9.P$1 JP9.1 U2.14
B3: CON27.P$1 JP27.1 U6.4
B4: CON24.P$1 JP24.1 U6.14
B5: CON42.P$1 JP42.1 U9.4
B6: CON39.P$1 JP39.1 U9.14
B7: CON57.P$1 JP57.1 U12.4
B8: CON54.P$1 JP54.1 U12.14
B9: CON72.P$1 JP72.1 U15.4
B10: CON69.P$1 JP69.1 U15.14
B11: CON87.P$1 JP87.1 U18.4
B12: CON84.P$1 JP84.1 U18.14
CPAD1: R3.2 U1.14
CPAD2: R2.2 U1.15
CPAD3: R21.2 U5.14
CPAD4: R20.2 U5.15
CPAD5: R32.2 U8.14
CPAD6: R31.2 U8.15
CPAD7: R43.2 U11.14
CPAD8: R42.2 U11.15
CPAD9: R54.2 U14.14
CPAD10: R53.2 U14.15
CPAD11: R65.2 U17.14
CPAD12: R64.2 U17.15
CSN: U1.16 U2.9
CSN1: U5.16 U6.9
CSN2: U8.16 U9.9
CSN3: U11.16 U12.9
CSN4: U14.16 U15.9
CSN5: U17.16 U18.9
GND: C1.C C2.C C3.2 C4.2 C5.C C6.2 C7.A C8.1 CON7.P$1 J2.1 JP7.1 S1.3 U1.20 U2.11 U3.2
GND1: C9.C C10.A C11.2 C12.1 C13.2 C14.2 C15.C C16.C CON22.P$1 J4.1 JP22.1 S2.3 U4.2 U5.20 U6.11
GND2: C17.C C18.A C19.2 C20.1 C21.2 C22.2 C23.C C24.C CON37.P$1 J6.1 JP37.1 S3.3 U7.2 U8.20 U9.11
GND3: C25.C C26.A C27.2 C28.1 C29.2 C30.2 C31.C C32.C CON52.P$1 J8.1 JP52.1 S4.3 U10.2 U11.20 U12.11
GND4: C33.C C34.A C35.2 C36.1 C37.2 C38.2 C39.C C40.C CON67.P$1 J10.1 JP67.1 S5.3 U13.2 U14.20 U15.11
GND5: C41.C C42.A C43.2 C44.1 C45.2 C46.2 C47.C C48.C CON82.P$1 J12.1 JP82.1 S6.3 U16.2 U17.20 U18.11
LA0: R4.2 R8.2 TP4.P$1 U1.19
LA1: R5.2 R9.2 TP5.P$1 U1.18
LA2: R6.2 R10.2 U1.2
LA3: R7.2 R11.2 U1.3
LA4: R14.2 R18.2 U5.2
LA5: R15.2 R19.2 U5.3
LA6: R13.2 R17.2 TP10.P$1 U5.18
LA7: R12.2 R16.2 TP9.P$1 U5.19
LA8: R25.2 R29.2 U8.2
LA9: R26.2 R30.2 U8.3
LA10: R24.2 R28.2 TP15.P$1 U8.18
LA11: R23.2 R27.2 TP14.P$1 U8.19
LA12: R36.2 R40.2 U11.2
LA13: R37.2 R41.2 U11.3
LA14: R35.2 R39.2 TP20.P$1 U11.18
LA15: R34.2 R38.2 TP19.P$1 U11.19
LA16: R47.2 R51.2 U14.2
LA17: R48.2 R52.2 U14.3
LA18: R46.2 R50.2 TP25.P$1 U14.18
LA19: R45.2 R49.2 TP24.P$1 U14.19
LA20: R58.2 R62.2 U17.2
LA21: R59.2 R63.2 U17.3
LA22: R57.2 R61.2 TP30.P$1 U17.18
LA23: R56.2 R60.2 TP29.P$1 U17.19
LED_PWM1: D1.C D2.C D3.C D4.C U1.17
LED_PWM2: D5.C D6.C D7.C D8.C U1.8
LED_PWM3: D9.C D10.C D11.C D12.C U5.17
LED_PWM4: D13.C D14.C D15.C D16.C U5.8
LED_PWM5: D17.C D18.C D19.C D20.C U8.17
LED_PWM6: D21.C D22.C D23.C D24.C U8.8
LED_PWM7: D25.C D26.C D27.C D28.C U11.17
LED_PWM8: D29.C D30.C D31.C D32.C U11.8
LED_PWM9: D33.C D34.C D35.C D36.C U14.17
LED_PWM10: D37.C D38.C D39.C D40.C U14.8
LED_PWM11: D41.C D42.C D43.C D44.C U17.17
LED_PWM12: D45.C D46.C D47.C D48.C U17.8
N$1: D1.A R4.1
N$2: D2.A R5.1
N$3: D3.A R6.1
N$4: D4.A R7.1
N$5: D5.A R8.1
N$6: D6.A R9.1
N$7: D7.A R10.1
N$8: D8.A R11.1
N$10: R20.1 TS2.P$2
N$11: R21.1 TS2.P$1
N$12: D9.A R12.1
N$13: D10.A R13.1
N$14: D11.A R14.1
N$15: D12.A R15.1
N$16: D13.A R16.1
N$17: D14.A R17.1
N$18: D15.A R18.1
N$19: D16.A R19.1
N$21: R31.1 TS3.P$2
N$22: R32.1 TS3.P$1
N$23: D17.A R23.1
N$24: D18.A R24.1
N$25: D19.A R25.1
N$26: D20.A R26.1
N$27: D21.A R27.1
N$28: D22.A R28.1
N$29: D23.A R29.1
N$30: D24.A R30.1
N$32: R42.1 TS4.P$2
N$33: R43.1 TS4.P$1
N$34: D25.A R34.1
N$35: D26.A R35.1
N$36: D27.A R36.1
N$37: R2.1 TS1.P$2
N$38: R3.1 TS1.P$1
N$39: D28.A R37.1
N$40: D29.A R38.1
N$41: D30.A R39.1
N$42: D31.A R40.1
N$43: D32.A R41.1
N$45: R53.1 TS5.P$2
N$46: R54.1 TS5.P$1
N$47: D33.A R45.1
N$48: D34.A R46.1
N$49: D35.A R47.1
N$50: D36.A R48.1
N$51: D37.A R49.1
N$52: D38.A R50.1
N$53: D39.A R51.1
N$54: D40.A R52.1
N$56: R64.1 TS6.P$2
N$57: R65.1 TS6.P$1
N$58: D41.A R56.1
N$59: D42.A R57.1
N$60: D43.A R58.1
N$61: D44.A R59.1
N$62: D45.A R60.1
N$63: D46.A R61.1
N$64: D47.A R62.1
N$65: D48.A R63.1
PWM_OUT: CON3.P$1 JP3.1 U1.7
PWM_OUT1: CON18.P$1 JP18.1 U5.7
PWM_OUT2: CON33.P$1 JP33.1 U8.7
PWM_OUT3: CON48.P$1 JP48.1 U11.7
PWM_OUT4: CON63.P$1 JP63.1 U14.7
PWM_OUT5: CON78.P$1 JP78.1 U17.7
RX: CON4.P$1 JP4.1 U1.5
RX1: CON19.P$1 JP19.1 U5.5
RX2: CON34.P$1 JP34.1 U8.5
RX3: CON49.P$1 JP49.1 U11.5
RX4: CON64.P$1 JP64.1 U14.5
RX5: CON79.P$1 JP79.1 U17.5
SCL: CON2.P$1 JP2.1 U1.10
SCL1: CON17.P$1 JP17.1 U5.10
SCL2: CON32.P$1 JP32.1 U8.10
SCL3: CON47.P$1 JP47.1 U11.10
SCL4: CON62.P$1 JP62.1 U14.10
SCL5: CON77.P$1 JP77.1 U17.10
SCLK: U1.11 U2.7
SCLK1: U5.11 U6.7
SCLK2: U8.11 U9.7
SCLK3: U11.11 U12.7
SCLK4: U14.11 U15.7
SCLK5: U17.11 U18.7
SDA: CON1.P$1 JP1.1 U1.12
SDA1: CON16.P$1 JP16.1 U5.12
SDA2: CON31.P$1 JP31.1 U8.12
SDA3: CON46.P$1 JP46.1 U11.12
SDA4: CON61.P$1 JP61.1 U14.12
SDA5: CON76.P$1 JP76.1 U17.12
SDO: U1.9 U2.8
SDO1: U5.9 U6.8
SDO2: U8.9 U9.8
SDO3: U11.9 U12.8
SDO4: U14.9 U15.8
SDO5: U17.9 U18.8
TX: CON5.P$1 JP5.1 U1.6
TX1: CON20.P$1 JP20.1 U5.6
TX2: CON35.P$1 JP35.1 U8.6
TX3: CON50.P$1 JP50.1 U11.6
TX4: CON65.P$1 JP65.1 U14.6
TX5: CON80.P$1 JP80.1 U17.6
V+: C5.A C6.1 CON15.P$1 J1.2 JP15.1 U2.5
V+1: C9.A C11.1 CON30.P$1 J3.2 JP30.1 U6.5
V+2: C17.A C19.1 CON45.P$1 J5.2 JP45.1 U9.5
V+3: C25.A C27.1 CON60.P$1 J7.2 JP60.1 U12.5
V+4: C33.A C35.1 CON75.P$1 J9.2 JP75.1 U15.5
V+5: C41.A C43.1 CON90.P$1 J11.2 JP90.1 U18.5
V-: C7.C C8.2 CON8.P$1 J2.2 JP8.1 U2.12
V-1: C10.C C12.2 CON23.P$1 J4.2 JP23.1 U6.12
V-2: C18.C C20.2 CON38.P$1 J6.2 JP38.1 U9.12
V-3: C26.C C28.2 CON53.P$1 J8.2 JP53.1 U12.12
V-4: C34.C C36.2 CON68.P$1 J10.2 JP68.1 U15.12
V-5: C42.C C44.2 CON83.P$1 J12.2 JP83.1 U18.12
VIN: C1.A CON6.P$1 JP6.1 U3.1 U3.3
VIN1: C15.A CON21.P$1 JP21.1 U4.1 U4.3
VIN2: C23.A CON36.P$1 JP36.1 U7.1 U7.3
VIN3: C31.A CON51.P$1 JP51.1 U10.1 U10.3
VIN4: C39.A CON66.P$1 JP66.1 U13.1 U13.3
VIN5: C47.A CON81.P$1 JP81.1 U16.1 U16.3
VPP: R1.1 TP1.P$1 U1.4
VPP1: R22.1 TP8.P$1 U5.4
VPP2: R33.1 TP13.P$1 U8.4
VPP3: R44.1 TP18.P$1 U11.4
VPP4: R55.1 TP23.P$1 U14.4
VPP5: R66.1 TP28.P$1 U17.4
W1: CON13.P$1 JP13.1 U2.3
W2: CON10.P$1 JP10.1 U2.15
W3: CON28.P$1 JP28.1 U6.3
W4: CON25.P$1 JP25.1 U6.15
W5: CON43.P$1 JP43.1 U9.3
W6: CON40.P$1 JP40.1 U9.15
W7: CON58.P$1 JP58.1 U12.3
W8: CON55.P$1 JP55.1 U12.15
W9: CON73.P$1 JP73.1 U15.3
W10: CON70.P$1 JP70.1 U15.15
W11: CON88.P$1 JP88.1 U18.3
W12: CON85.P$1 JP85.1 U18.15

## Tracks (layer width: path | path; a pad name or v marks a point on that pad's centre or on a via)
+5V  (via drill 0.51)
  Top 0.254: C4.1 v39.88,66.55
  Top 0.305: U1.1 16.13,68.46
  Top 0.406: 27.69,76.33 22.73,71.37 19.81,71.37 19.56,71.63 | J1.1 27.4,76.71 | 27.4,76.71 27.4,76.61 | 27.69,76.33 27.69,76.42 27.4,76.71 | 16.13,68.46 16.64,68.96 16.64,69.68 R1.2 | 17.27,71.25 16.6,70.57 R1.2 | 19.56,71.63 19.56,72.55 U3.5 | 19.56,71.63 19.18,71.25 17.27,71.25 | 17.27,71.25 17.02,71.5 TP2.P$1 | C3.1 18.29,68.83 17.4,69.72 R1.2 | 27.69,76.33 C2.A 27.81,75.06 28.07,74.8 36.07,74.8 36.7,74.17 36.7,72.59 38.68,70.61 38.68,69.01 39.24,68.45 v39.88,68.45 40.17,68.75 U2.6 42.2,68.75 42.93,69.47 43.43,69.47 44.01,70.05 45.34,70.05 | U2.13 45.34,70.05 | U2.10 45.95,68.1 45.34,68.71 45.34,70.05
  Bottom 0.305: v39.88,66.55 v39.88,68.45
+5V1  (via drill 0.51)
  Top 0.254: C13.1 v84.84,66.55
  Top 0.305: U5.1 61.09,68.46
  Top 0.406: 72.65,76.33 67.69,71.37 64.77,71.37 64.52,71.63 | J3.1 72.36,76.71 | 72.36,76.71 72.36,76.61 | 72.65,76.33 72.65,76.42 72.36,76.71 | 61.09,68.46 61.59,68.96 61.59,69.68 R22.2 | 62.23,71.25 61.56,70.57 R22.2 | 64.52,71.63 64.52,72.55 U4.5 | 64.52,71.63 64.14,71.25 62.23,71.25 | 62.23,71.25 61.98,71.5 TP6.P$1 | C14.1 63.25,68.83 62.36,69.72 R22.2 | 72.65,76.33 C16.A 72.77,75.06 73.03,74.8 81.03,74.8 81.66,74.17 81.66,72.59 83.64,70.61 83.64,69.01 84.2,68.45 v84.84,68.45 85.13,68.75 U6.6 87.16,68.75 87.88,69.47 88.39,69.47 88.97,70.05 90.3,70.05 | U6.13 90.3,70.05 | U6.10 90.91,68.1 90.3,68.71 90.3,70.05
  Bottom 0.305: v84.84,66.55 v84.84,68.45
+5V2  (via drill 0.51)
  Top 0.254: C21.1 v129.79,66.55
  Top 0.305: U8.1 106.05,68.46
  Top 0.406: 117.61,76.33 112.65,71.37 109.73,71.37 109.47,71.63 | J5.1 117.32,76.71 | 117.32,76.71 117.32,76.61 | 117.61,76.33 117.61,76.42 117.32,76.71 | 106.05,68.46 106.55,68.96 106.55,69.68 R33.2 | 107.19,71.25 106.51,70.57 R33.2 | 109.47,71.63 109.47,72.55 U7.5 | 109.47,71.63 109.09,71.25 107.19,71.25 | 107.19,71.25 106.93,71.5 TP11.P$1 | C22.1 108.2,68.83 107.31,69.72 R33.2 | 117.61,76.33 C24.A 117.73,75.06 117.98,74.8 125.98,74.8 126.62,74.17 126.62,72.59 128.6,70.61 128.6,69.01 129.16,68.45 v129.79,68.45 130.09,68.75 U9.6 132.12,68.75 132.84,69.47 133.35,69.47 133.93,70.05 135.25,70.05 | U9.13 135.25,70.05 | U9.10 135.86,68.1 135.25,68.71 135.25,70.05
  Bottom 0.305: v129.79,66.55 v129.79,68.45
+5V3  (via drill 0.51)
  Top 0.254: C29.1 v39.88,145.8
  Top 0.305: U11.1 16.13,147.71
  Top 0.406: 27.69,155.58 22.73,150.62 19.81,150.62 19.56,150.88 | J7.1 27.4,155.96 | 27.4,155.96 27.4,155.86 | 27.69,155.58 27.69,155.67 27.4,155.96 | 16.13,147.71 16.64,148.21 16.64,148.93 R44.2 | 17.27,150.5 16.6,149.82 R44.2 | 19.56,150.88 19.56,151.8 U10.5 | 19.56,150.88 19.18,150.5 17.27,150.5 | 17.27,150.5 17.02,150.75 TP16.P$1 | C30.1 18.29,148.08 17.4,148.97 R44.2 | 27.69,155.58 27.69,155.57 C32.A 27.81,154.31 28.07,154.05 36.07,154.05 36.7,153.42 36.7,151.84 38.68,149.86 38.68,148.26 39.24,147.7 v39.88,147.7 40.17,148 U12.6 42.2,148 42.93,148.72 43.43,148.72 44.01,149.3 45.34,149.3 | U12.13 45.34,149.3 | U12.10 45.95,147.35 45.34,147.96 45.34,149.3
  Bottom 0.305: v39.88,145.8 v39.88,147.7
+5V4  (via drill 0.51)
  Top 0.254: C37.1 v84.84,145.8
  Top 0.305: U14.1 61.09,147.71
  Top 0.406: 72.65,155.58 67.69,150.62 64.77,150.62 64.52,150.88 | J9.1 72.36,155.96 | 72.36,155.96 72.36,155.86 | 72.65,155.58 72.65,155.67 72.36,155.96 | 61.09,147.71 61.59,148.21 61.59,148.93 R55.2 | 62.23,150.5 61.56,149.82 R55.2 | 64.52,150.88 64.52,151.8 U13.5 | 64.52,150.88 64.14,150.5 62.23,150.5 | 62.23,150.5 61.98,150.75 TP21.P$1 | C38.1 63.25,148.08 62.36,148.97 R55.2 | 72.65,155.58 72.65,155.57 C40.A 72.77,154.31 73.03,154.05 81.03,154.05 81.66,153.42 81.66,151.84 83.64,149.86 83.64,148.26 84.2,147.7 v84.84,147.7 85.13,148 U15.6 87.16,148 87.88,148.72 88.39,148.72 88.97,149.3 90.3,149.3 | U15.13 90.3,149.3 | U15.10 90.91,147.35 90.3,147.96 90.3,149.3
  Bottom 0.305: v84.84,145.8 v84.84,147.7
+5V5  (via drill 0.51)
  Top 0.254: C45.1 v129.79,145.8
  Top 0.305: U17.1 106.05,147.71
  Top 0.406: 117.61,155.58 112.65,150.62 109.73,150.62 109.47,150.88 | J11.1 117.32,155.96 | 117.32,155.96 117.32,155.86 | 117.61,155.58 117.61,155.67 117.32,155.96 | 106.05,147.71 106.55,148.21 106.55,148.93 R66.2 | 107.19,150.5 106.51,149.82 R66.2 | 109.47,150.88 109.47,151.8 U16.5 | 109.47,150.88 109.09,150.5 107.19,150.5 | 107.19,150.5 106.93,150.75 TP26.P$1 | C46.1 108.2,148.08 107.31,148.97 R66.2 | 117.61,155.58 117.61,155.57 C48.A 117.73,154.31 117.98,154.05 125.98,154.05 126.62,153.42 126.62,151.84 128.6,149.86 128.6,148.26 129.16,147.7 v129.79,147.7 130.09,148 U18.6 132.12,148 132.84,148.72 133.35,148.72 133.93,149.3 135.25,149.3 | U18.13 135.25,149.3 | U18.10 135.86,147.35 135.25,147.96 135.25,149.3
  Bottom 0.305: v129.79,145.8 v129.79,147.7
A1
  Top 0.254: 42.32,71.35 U2.2
  Top 0.305: 42.32,71.35 42.55,71.58 42.55,72.11 41.63,73.03 41.63,73.05 38.23,76.45 36.83,76.45 35.43,77.85 33.66,77.85 33.53,77.98 CON14.P$1
  Top 0.406: CON14.P$1 JP14.1
A2
  Top 0.254: 41.15,76.58 CON11.P$1
  Top 0.305: 41.15,76.58 45.73,72 U2.16
  Top 0.406: CON11.P$1 JP11.1
A3
  Top 0.254: 87.27,71.35 U6.2
  Top 0.305: 87.27,71.35 87.5,71.58 87.5,72.11 86.59,73.03 86.59,73.05 83.19,76.45 81.79,76.45 80.39,77.85 78.61,77.85 78.49,77.98 CON29.P$1
  Top 0.406: CON29.P$1 JP29.1
A4
  Top 0.254: 86.11,76.58 CON26.P$1
  Top 0.305: 86.11,76.58 90.69,72 U6.16
  Top 0.406: CON26.P$1 JP26.1
A5
  Top 0.254: 132.23,71.35 U9.2
  Top 0.305: 132.23,71.35 132.46,71.58 132.46,72.11 131.55,73.03 131.55,73.05 128.14,76.45 126.75,76.45 125.35,77.85 123.57,77.85 123.44,77.98 CON44.P$1
  Top 0.406: CON44.P$1 JP44.1
A6
  Top 0.254: 131.06,76.58 CON41.P$1
  Top 0.305: 131.06,76.58 135.65,72 U9.16
  Top 0.406: CON41.P$1 JP41.1
A7
  Top 0.254: 42.32,150.6 U12.2
  Top 0.305: 42.32,150.6 42.55,150.82 42.55,151.36 41.63,152.27 41.63,152.3 38.23,155.7 36.83,155.7 35.43,157.1 33.66,157.1 33.53,157.23 CON59.P$1
  Top 0.406: CON59.P$1 JP59.1
A8
  Top 0.254: 41.15,155.83 CON56.P$1
  Top 0.305: 41.15,155.83 45.73,151.25 U12.16
  Top 0.406: CON56.P$1 JP56.1
A9
  Top 0.254: 87.27,150.6 U15.2
  Top 0.305: 87.27,150.6 87.5,150.82 87.5,151.36 86.59,152.27 86.59,152.3 83.19,155.7 81.79,155.7 80.39,157.1 78.61,157.1 78.49,157.23 CON74.P$1
  Top 0.406: CON74.P$1 JP74.1
A10
  Top 0.254: 86.11,155.83 CON71.P$1
  Top 0.305: 86.11,155.83 90.69,151.25 U15.16
  Top 0.406: CON71.P$1 JP71.1
A11
  Top 0.254: 132.23,150.6 U18.2
  Top 0.305: 132.23,150.6 132.46,150.82 132.46,151.36 131.55,152.27 131.55,152.3 128.14,155.7 126.75,155.7 125.35,157.1 123.57,157.1 123.44,157.23 CON89.P$1
  Top 0.406: CON89.P$1 JP89.1
A12
  Top 0.254: 131.06,155.83 CON86.P$1
  Top 0.305: 131.06,155.83 135.65,151.25 U18.16
  Top 0.406: CON86.P$1 JP86.1
AUX
  Top 0.254: TP3.P$1 9.02,43.69 9.02,40.64 S1.1
  Top 0.305: 9.02,43.69 9.02,56.77 11.58,59.34 U1.13
AUX1
  Top 0.254: TP7.P$1 53.98,43.69 53.98,40.64 S2.1
  Top 0.305: 53.98,43.69 53.98,56.77 56.54,59.34 U5.13
AUX2
  Top 0.254: TP12.P$1 98.93,43.69 98.93,40.64 S3.1
  Top 0.305: 98.93,43.69 98.93,56.77 101.5,59.34 U8.13
AUX3
  Top 0.254: TP17.P$1 9.02,122.94 9.02,119.89 S4.1
  Top 0.305: 9.02,122.94 9.02,136.02 11.58,138.58 U11.13
AUX4
  Top 0.254: TP22.P$1 53.98,122.94 53.98,119.89 S5.1
  Top 0.305: 53.98,122.94 53.98,136.02 56.54,138.58 U14.13
AUX5
  Top 0.254: TP27.P$1 98.93,122.94 98.93,119.89 S6.1
  Top 0.305: 98.93,122.94 98.93,136.02 101.5,138.58 U17.13
B1
  Top 0.254: CON12.P$1 38.61,77.98 43.81,72.77 43.81,70.99 42.87,70.05 U2.4
  Top 0.406: CON12.P$1 JP12.1
B2
  Top 0.254: CON9.P$1 46.23,77.98 46.58,77.62 48.26,77.62 48.82,77.06 48.82,71.02 48.5,70.7 U2.14
  Top 0.406: CON9.P$1 JP9.1
B3
  Top 0.254: CON27.P$1 83.57,77.98 88.77,72.77 88.77,70.99 87.83,70.05 U6.4
  Top 0.406: CON27.P$1 JP27.1
B4
  Top 0.254: CON24.P$1 91.19,77.98 91.54,77.62 93.22,77.62 93.78,77.06 93.78,71.02 93.46,70.7 U6.14
  Top 0.406: CON24.P$1 JP24.1
B5
  Top 0.254: CON42.P$1 128.52,77.98 133.73,72.77 133.73,70.99 132.79,70.05 U9.4
  Top 0.406: CON42.P$1 JP42.1
B6
  Top 0.254: CON39.P$1 136.14,77.98 136.5,77.62 138.18,77.62 138.74,77.06 138.74,71.02 138.41,70.7 U9.14
  Top 0.406: CON39.P$1 JP39.1
B7
  Top 0.254: CON57.P$1 38.61,157.23 43.81,152.02 43.81,150.24 42.87,149.3 U12.4
  Top 0.406: CON57.P$1 JP57.1
B8
  Top 0.254: CON54.P$1 46.23,157.23 46.58,156.87 48.26,156.87 48.82,156.31 48.82,150.27 48.5,149.95 U12.14
  Top 0.406: CON54.P$1 JP54.1
B9
  Top 0.254: CON72.P$1 83.57,157.23 88.77,152.02 88.77,150.24 87.83,149.3 U15.4
  Top 0.406: CON72.P$1 JP72.1
B10
  Top 0.254: CON69.P$1 91.19,157.23 91.54,156.87 93.22,156.87 93.78,156.31 93.78,150.27 93.46,149.95 U15.14
  Top 0.406: CON69.P$1 JP69.1
B11
  Top 0.254: CON87.P$1 128.52,157.23 133.73,152.02 133.73,150.24 132.79,149.3 U18.4
  Top 0.406: CON87.P$1 JP87.1
B12
  Top 0.254: CON84.P$1 136.14,157.23 136.5,156.87 138.18,156.87 138.74,156.31 138.74,150.27 138.41,149.95 U18.14
  Top 0.406: CON84.P$1 JP84.1
CPAD1
  Top 0.305: R3.2 14.73,50.04 13.97,50.8 13.97,55.37 12.23,57.11 U1.14
CPAD2
  Top 0.305: R2.2 15.49,53.85 14.99,54.36 14.99,56.13 12.88,58.24 U1.15
CPAD3
  Top 0.305: R21.2 59.69,50.04 58.93,50.8 58.93,55.37 57.19,57.11 U5.14
CPAD4
  Top 0.305: R20.2 60.45,53.85 59.94,54.36 59.94,56.13 57.84,58.24 U5.15
CPAD5
  Top 0.305: R32.2 104.65,50.04 103.89,50.8 103.89,55.37 102.15,57.11 U8.14
CPAD6
  Top 0.305: R31.2 105.41,53.85 104.9,54.36 104.9,56.13 102.8,58.24 U8.15
CPAD7
  Top 0.305: R43.2 14.73,129.29 13.97,130.05 13.97,134.62 12.23,136.36 U11.14
CPAD8
  Top 0.305: R42.2 15.49,133.1 14.99,133.6 14.99,135.38 12.88,137.49 U11.15
CPAD9
  Top 0.305: R54.2 59.69,129.29 58.93,130.05 58.93,134.62 57.19,136.36 U14.14
CPAD10
  Top 0.305: R53.2 60.45,133.1 59.94,133.6 59.94,135.38 57.84,137.49 U14.15
CPAD11
  Top 0.305: R65.2 104.65,129.29 103.89,130.05 103.89,134.62 102.15,136.36 U17.14
CPAD12
  Top 0.305: R64.2 105.41,133.1 104.9,133.6 104.9,135.38 102.8,137.49 U17.15
CSN  (via drill 0.51)
  Top 0.305: v9.91,66.17 9.91,64.77 11.94,62.74 13.21,62.74 13.53,62.41 U1.16 | v44.53,68.25 45.33,67.45 U2.9
  Bottom 0.305: v9.91,66.17 14.67,70.93 41.85,70.93 v44.53,68.25
CSN1  (via drill 0.51)
  Top 0.305: v54.86,66.17 54.86,64.77 56.9,62.74 58.17,62.74 58.49,62.41 U5.16 | v89.48,68.25 90.29,67.45 U6.9
  Bottom 0.305: v54.86,66.17 59.63,70.93 86.81,70.93 v89.48,68.25
CSN2  (via drill 0.51)
  Top 0.305: v99.82,66.17 99.82,64.77 101.85,62.74 103.12,62.74 103.45,62.41 U8.16 | v134.44,68.25 135.24,67.45 U9.9
  Bottom 0.305: v99.82,66.17 104.58,70.93 131.76,70.93 v134.44,68.25
CSN3  (via drill 0.51)
  Top 0.305: v9.91,145.41 9.91,144.02 11.94,141.99 13.21,141.99 13.53,141.66 U11.16 | v44.53,147.5 45.33,146.7 U12.9
  Bottom 0.305: v9.91,145.41 14.67,150.18 41.85,150.18 v44.53,147.5
CSN4  (via drill 0.51)
  Top 0.305: v54.86,145.41 54.86,144.02 56.9,141.99 58.17,141.99 58.49,141.66 U14.16 | v89.48,147.5 90.29,146.7 U15.9
  Bottom 0.305: v54.86,145.41 59.63,150.18 86.81,150.18 v89.48,147.5
CSN5  (via drill 0.51)
  Top 0.305: v99.82,145.41 99.82,144.02 101.85,141.99 103.12,141.99 103.45,141.66 U17.16 | v134.44,147.5 135.24,146.7 U18.9
  Bottom 0.305: v99.82,145.41 104.58,150.18 131.76,150.18 v134.44,147.5
GND  (via drill 0.51)
  Top 0.254: J2.1 47.5,61.47 46.23,62.74 46.23,63.88 C7.A 46.1,65.15 | 46.1,65.15 46.23,65.28 47.5,65.28 49.4,67.18 C8.1 | 46.1,65.15 v45.33,65.91 v45.34,65.91 44.7,66.55 C4.2 | S1.3 v16.38,36.7 | C6.2 39.88,73.53 v39.24,74.17
  Top 0.305: v18.29,61.72 18.29,59.31 17.78,58.8 16.76,58.8 16.13,59.43 U1.20 | U2.11 47.97,68.75 48.48,68.24 C8.1 | C1.C 24.64,76.84
  Top 0.406: 24.64,76.84 CON7.P$1 JP7.1 | C1.C 24.77,75.06 23.24,73.53 U3.2 | v33.53,72.9 33.02,73.4 C5.C C2.C | C3.2 v18.29,61.72
  Bottom 0.254: v16.38,36.7 17.02,36.7
  Bottom 0.406: v39.24,74.17 38.73,74.68
  other vias: 24.64,17.14 32.26,17.14 24.64,69.72 32.26,69.72 20.45,67.82 20.45,52.58 20.45,22.1 37.08,24.64 37.08,37.34 37.08,50.04 37.08,65.28
  pour Bottom (isolate 0.305): 6.86,6.86 20.83,6.86 20.83,79.25 6.86,79.25
  pour Top (rank 3, hatched): 20.45,69.72 37.08,69.72 37.08,17.14 20.45,17.14 20.45,32.51 24.64,36.7 20.45,40.89 20.45,58.8 24.64,62.99 20.45,67.18
  pour Bottom: 36.7,6.86 51.31,6.86 51.31,80.52 36.7,80.52
  pour Bottom (isolate 0.305): 6.86,85.6 51.31,85.6 51.31,69.34 6.86,69.34
  pour Bottom: 6.86,17.65 51.31,17.65 51.31,6.86 6.86,6.86
GND1  (via drill 0.51)
  Top 0.254: J4.1 92.46,61.47 91.19,62.74 91.19,63.88 C10.A 91.06,65.15 | 91.06,65.15 91.19,65.28 92.46,65.28 94.36,67.18 C12.1 | 91.06,65.15 v90.29,65.91 v90.3,65.91 89.66,66.55 C13.2 | S2.3 v61.34,36.7 | C11.2 84.84,73.53 v84.2,74.17
  Top 0.305: v63.25,61.72 63.25,59.31 62.74,58.8 61.72,58.8 61.09,59.43 U5.20 | U6.11 92.92,68.75 93.43,68.24 C12.1 | C15.C 69.6,76.84
  Top 0.406: 69.6,76.84 CON22.P$1 JP22.1 | C15.C 69.72,75.06 68.2,73.53 U4.2 | v78.49,72.9 77.98,73.4 C9.C C16.C | C14.2 v63.25,61.72
  Bottom 0.254: v61.34,36.7 61.98,36.7
  Bottom 0.406: v84.2,74.17 83.69,74.68
  other vias: 69.6,17.14 77.22,17.14 69.6,69.72 77.22,69.72 65.41,67.82 65.41,52.58 65.41,22.1 82.04,24.64 82.04,37.34 82.04,50.04 82.04,65.28
  pour Bottom (isolate 0.305): 51.82,6.86 65.79,6.86 65.79,79.25 51.82,79.25
  pour Top (rank 3, hatched): 65.41,69.72 82.04,69.72 82.04,17.14 65.41,17.14 65.41,32.51 69.6,36.7 65.41,40.89 65.41,58.8 69.6,62.99 65.41,67.18
  pour Bottom: 81.66,6.86 96.27,6.86 96.27,80.52 81.66,80.52
  pour Bottom (isolate 0.305): 51.82,85.6 96.27,85.6 96.27,69.34 51.82,69.34
  pour Bottom: 51.82,17.65 96.27,17.65 96.27,6.86 51.82,6.86
GND2  (via drill 0.51)
  Top 0.254: J6.1 137.41,61.47 136.14,62.74 136.14,63.88 C18.A 136.01,65.15 | 136.01,65.15 136.14,65.28 137.41,65.28 139.32,67.18 C20.1 | 136.01,65.15 v135.25,65.91 134.62,66.55 C21.2 | S3.3 v106.3,36.7 | C19.2 129.79,73.53 v129.16,74.17
  Top 0.305: v108.2,61.72 108.2,59.31 107.7,58.8 106.68,58.8 106.05,59.43 U8.20 | U9.11 137.88,68.75 138.39,68.24 C20.1 | C23.C 114.55,76.84
  Top 0.406: 114.55,76.84 CON37.P$1 JP37.1 | C23.C 114.68,75.06 113.16,73.53 U7.2 | v123.44,72.9 122.94,73.4 C17.C C24.C | C22.2 v108.2,61.72
  Bottom 0.254: v106.3,36.7 106.93,36.7
  Bottom 0.406: v129.16,74.17 128.65,74.68
  other vias: 114.55,17.14 122.17,17.14 114.55,69.72 122.17,69.72 110.36,67.82 110.36,52.58 110.36,22.1 127,24.64 127,37.34 127,50.04 127,65.28
  pour Bottom (isolate 0.305): 96.77,6.86 110.74,6.86 110.74,79.25 96.77,79.25
  pour Top (rank 3, hatched): 110.36,69.72 127,69.72 127,17.14 110.36,17.14 110.36,32.51 114.55,36.7 110.36,40.89 110.36,58.8 114.55,62.99 110.36,67.18
  pour Bottom: 126.62,6.86 141.22,6.86 141.22,80.52 126.62,80.52
  pour Bottom (isolate 0.305): 96.77,85.6 141.22,85.6 141.22,69.34 96.77,69.34
  pour Bottom: 96.77,17.65 141.22,17.65 141.22,6.86 96.77,6.86
GND3  (via drill 0.51)
  Top 0.254: J8.1 47.5,140.72 46.23,141.99 46.23,143.13 C26.A 46.1,144.4 | 46.1,144.4 46.23,144.53 47.5,144.53 49.4,146.43 C28.1 | 46.1,144.4 v45.33,145.16 v45.34,145.16 44.7,145.8 C29.2 | S4.3 v16.38,115.95 | C27.2 39.88,152.78 v39.24,153.42
  Top 0.305: v18.29,140.97 18.29,138.56 17.78,138.05 16.76,138.05 16.13,138.68 U11.20 | U12.11 47.97,148 48.48,147.49 C28.1 | C31.C 24.64,156.09
  Top 0.406: 24.64,156.09 CON52.P$1 JP52.1 | C31.C 24.77,154.31 23.24,152.78 U10.2 | v33.53,152.15 33.02,152.65 C25.C C32.C | C30.2 v18.29,140.97
  Bottom 0.254: v16.38,115.95 17.02,115.95
  Bottom 0.406: v39.24,153.42 38.73,153.92
  other vias: 24.64,96.39 32.26,96.39 24.64,148.97 32.26,148.97 20.45,147.07 20.45,131.83 20.45,101.35 37.08,103.89 37.08,116.59 37.08,129.29 37.08,144.53
  pour Bottom (isolate 0.305): 6.86,86.11 20.83,86.11 20.83,158.5 6.86,158.5
  pour Top (rank 3, hatched): 20.45,148.97 37.08,148.97 37.08,96.39 20.45,96.39 20.45,111.76 24.64,115.95 20.45,120.14 20.45,138.05 24.64,142.24 20.45,146.43
  pour Bottom: 36.7,86.11 51.31,86.11 51.31,159.77 36.7,159.77
  pour Bottom (isolate 0.305): 6.86,164.85 51.31,164.85 51.31,148.59 6.86,148.59
  pour Bottom: 6.86,96.9 51.31,96.9 51.31,86.11 6.86,86.11
GND4  (via drill 0.51)
  Top 0.254: J10.1 92.46,140.72 91.19,141.99 91.19,143.13 C34.A 91.06,144.4 | 91.06,144.4 91.19,144.53 92.46,144.53 94.36,146.43 C36.1 | 91.06,144.4 v90.29,145.16 v90.3,145.16 89.66,145.8 C37.2 | S5.3 v61.34,115.95 | C35.2 84.84,152.78 v84.2,153.42
  Top 0.305: v63.25,140.97 63.25,138.56 62.74,138.05 61.72,138.05 61.09,138.68 U14.20 | U15.11 92.92,148 93.43,147.49 C36.1 | C39.C 69.6,156.09
  Top 0.406: 69.6,156.09 CON67.P$1 JP67.1 | C39.C 69.72,154.31 68.2,152.78 U13.2 | v78.49,152.15 77.98,152.65 C33.C C40.C | C38.2 v63.25,140.97
  Bottom 0.254: v61.34,115.95 61.98,115.95
  Bottom 0.406: v84.2,153.42 83.69,153.92
  other vias: 69.6,96.39 77.22,96.39 69.6,148.97 77.22,148.97 65.41,147.07 65.41,131.83 65.41,101.35 82.04,103.89 82.04,116.59 82.04,129.29 82.04,144.53
  pour Bottom (isolate 0.305): 51.82,86.11 65.79,86.11 65.79,158.5 51.82,158.5
  pour Top (rank 3, hatched): 65.41,148.97 82.04,148.97 82.04,96.39 65.41,96.39 65.41,111.76 69.6,115.95 65.41,120.14 65.41,138.05 69.6,142.24 65.41,146.43
  pour Bottom: 81.66,86.11 96.27,86.11 96.27,159.77 81.66,159.77
  pour Bottom (isolate 0.305): 51.82,164.85 96.27,164.85 96.27,148.59 51.82,148.59
  pour Bottom: 51.82,96.9 96.27,96.9 96.27,86.11 51.82,86.11
GND5  (via drill 0.51)
  Top 0.254: J12.1 137.41,140.72 136.14,141.99 136.14,143.13 C42.A 136.01,144.4 | 136.01,144.4 136.14,144.53 137.41,144.53 139.32,146.43 C44.1 | 136.01,144.4 v135.25,145.16 134.62,145.8 C45.2 | S6.3 v106.3,115.95 | C43.2 129.79,152.78 v129.16,153.42
  Top 0.305: v108.2,140.97 108.2,138.56 107.7,138.05 106.68,138.05 106.05,138.68 U17.20 | U18.11 137.88,148 138.39,147.49 C44.1 | C47.C 114.55,156.09
  Top 0.406: 114.55,156.09 CON82.P$1 JP82.1 | C47.C 114.68,154.31 113.16,152.78 U16.2 | v123.44,152.15 122.94,152.65 C41.C C48.C | C46.2 v108.2,140.97
  Bottom 0.254: v106.3,115.95 106.93,115.95
  Bottom 0.406: v129.16,153.42 128.65,153.92
  other vias: 114.55,96.39 122.17,96.39 114.55,148.97 122.17,148.97 110.36,147.07 110.36,131.83 110.36,101.35 127,103.89 127,116.59 127,129.29 127,144.53
  pour Bottom (isolate 0.305): 96.77,86.11 110.74,86.11 110.74,158.5 96.77,158.5
  pour Top (rank 3, hatched): 110.36,148.97 127,148.97 127,96.39 110.36,96.39 110.36,111.76 114.55,115.95 110.36,120.14 110.36,138.05 114.55,142.24 110.36,146.43
  pour Bottom: 126.62,86.11 141.22,86.11 141.22,159.77 126.62,159.77
  pour Bottom (isolate 0.305): 96.77,164.85 141.22,164.85 141.22,148.59 96.77,148.59
  pour Bottom: 96.77,96.9 141.22,96.9 141.22,86.11 96.77,86.11
LA0  (via drill 0.51)
  Top 0.305: v16.13,62.1 15.48,61.46 U1.19 | v12.19,26.67 14.73,24.13 14.73,16.89 17.65,13.97 39.37,13.97 42.42,17.02 TP4.P$1 42.84,19.98 R4.2 46.01,19.98 46.86,20.83 46.86,41.78 45.81,42.84 R8.2
  Bottom 0.305: v16.13,62.1 10.54,62.1 9.91,61.47 9.91,28.96 v12.19,26.67
LA1  (via drill 0.51)
  Top 0.305: v15.24,62.99 14.83,62.59 U1.18 | v10.92,25.4 11.94,24.38 TP5.P$1 11.94,18.29 17.4,12.83 40.89,12.83 47.75,19.68 v47.75,24 47.75,47.24 46.74,48.26 45.15,48.26 45.15,48.36 R9.2 | v44.96,24 R5.2
  Bottom 0.305: v15.24,62.99 10.41,62.99 9.27,61.85 9.27,27.05 v10.92,25.4 | v47.75,24 v44.96,24
LA2  (via drill 0.51)
  Top 0.305: v13.21,64.52 14.22,64.52 15.48,65.78 U1.2 | v9.65,24.13 9.65,19.3 17.02,11.94 41.4,11.94 48.77,19.3 v48.77,29.72 48.77,53.21 47.71,54.27 R10.2 | v44.96,29.72 R6.2
  Bottom 0.305: v9.65,24.13 8.64,25.15 8.64,63.75 9.4,64.52 v13.21,64.52 | v48.77,29.72 v44.96,29.72
LA3  (via drill 0.51)